# Altium PCB AWT25-000093_ZIM1.PcbDoc (part 1 of 4)
Units mm, origin at the board's own origin, x right, y up, seen from the top; angles counter-clockwise.
Board outline 210 x 108 mm, 6 copper layers (Top Layer, Mid-Layer 1, Internal Plane 2, Power, Mid-Layer 2, Bottom Layer); 303 components, 298 nets, 1319 pads, 1113 vias.
Unrouted connection lines stored in the file: 85.
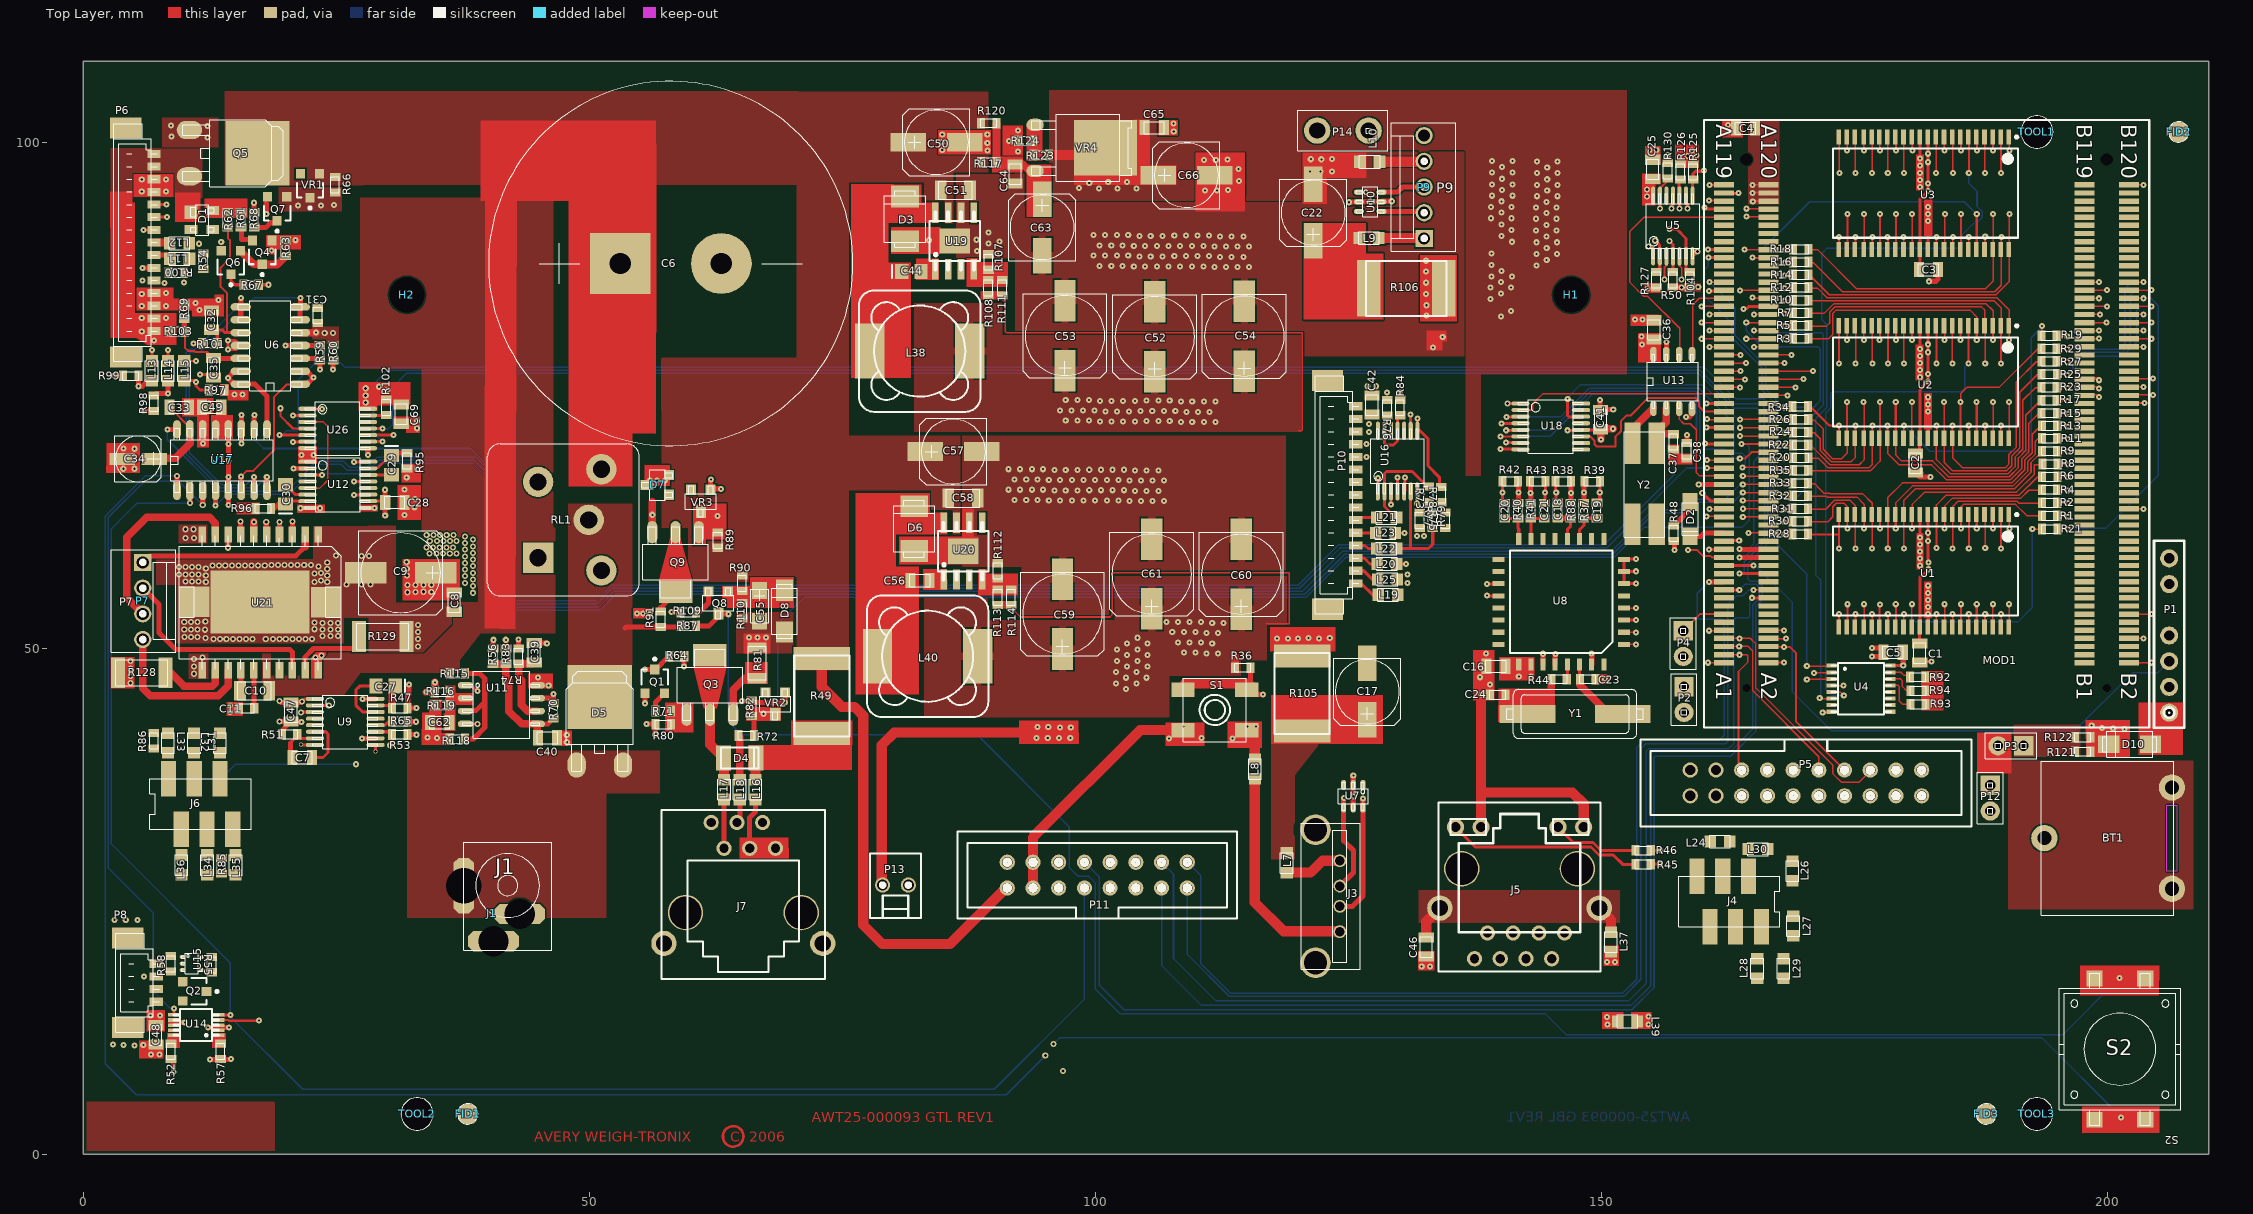
[diagram p0: Top Layer view]
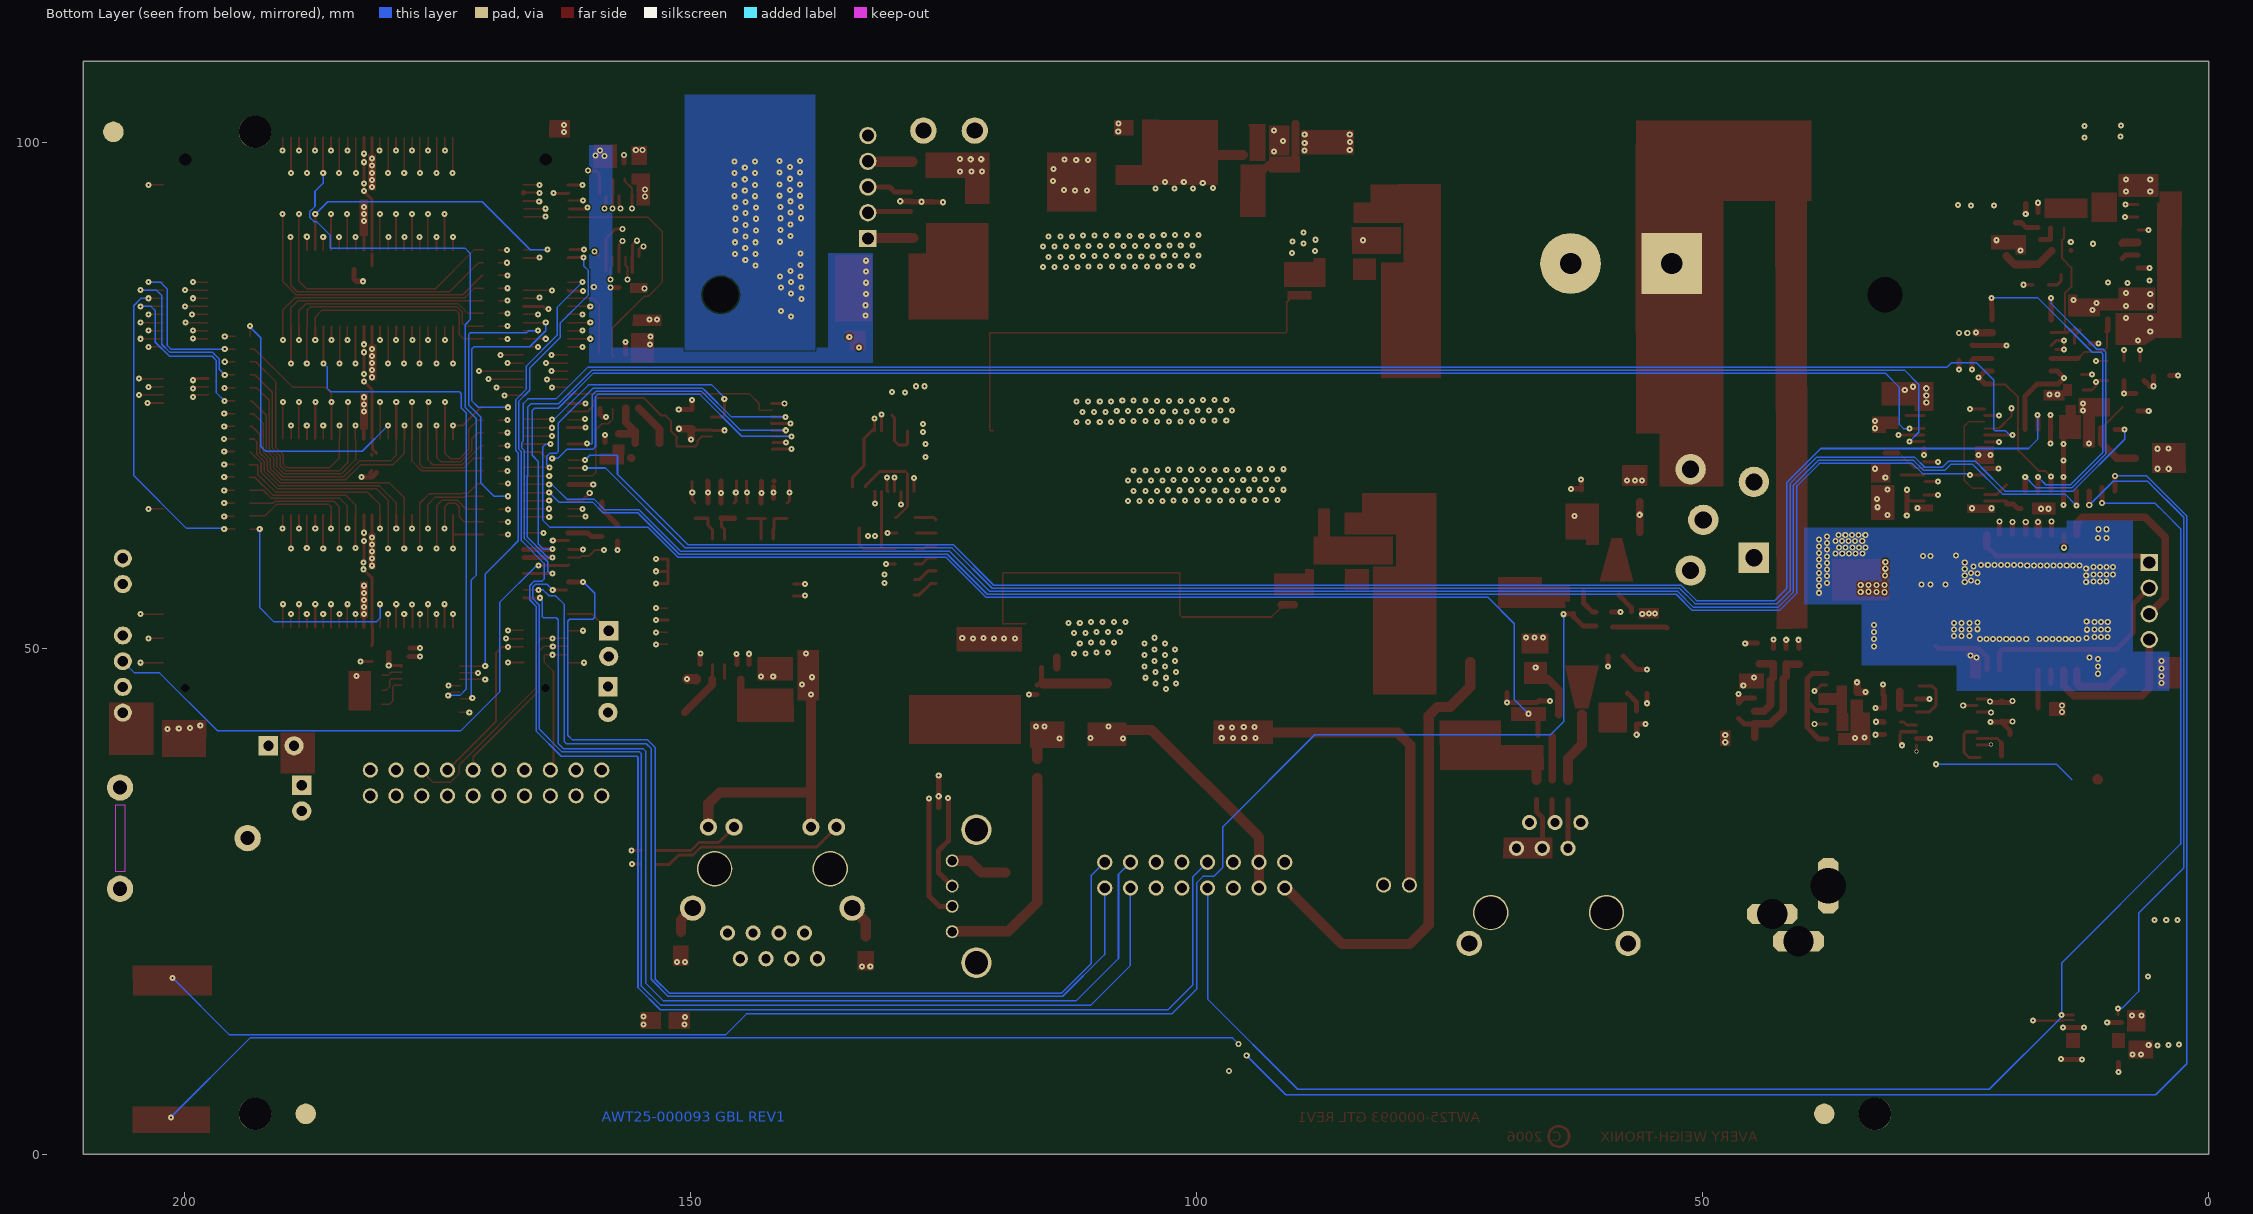
[diagram p1: Bottom Layer view, seen from below]
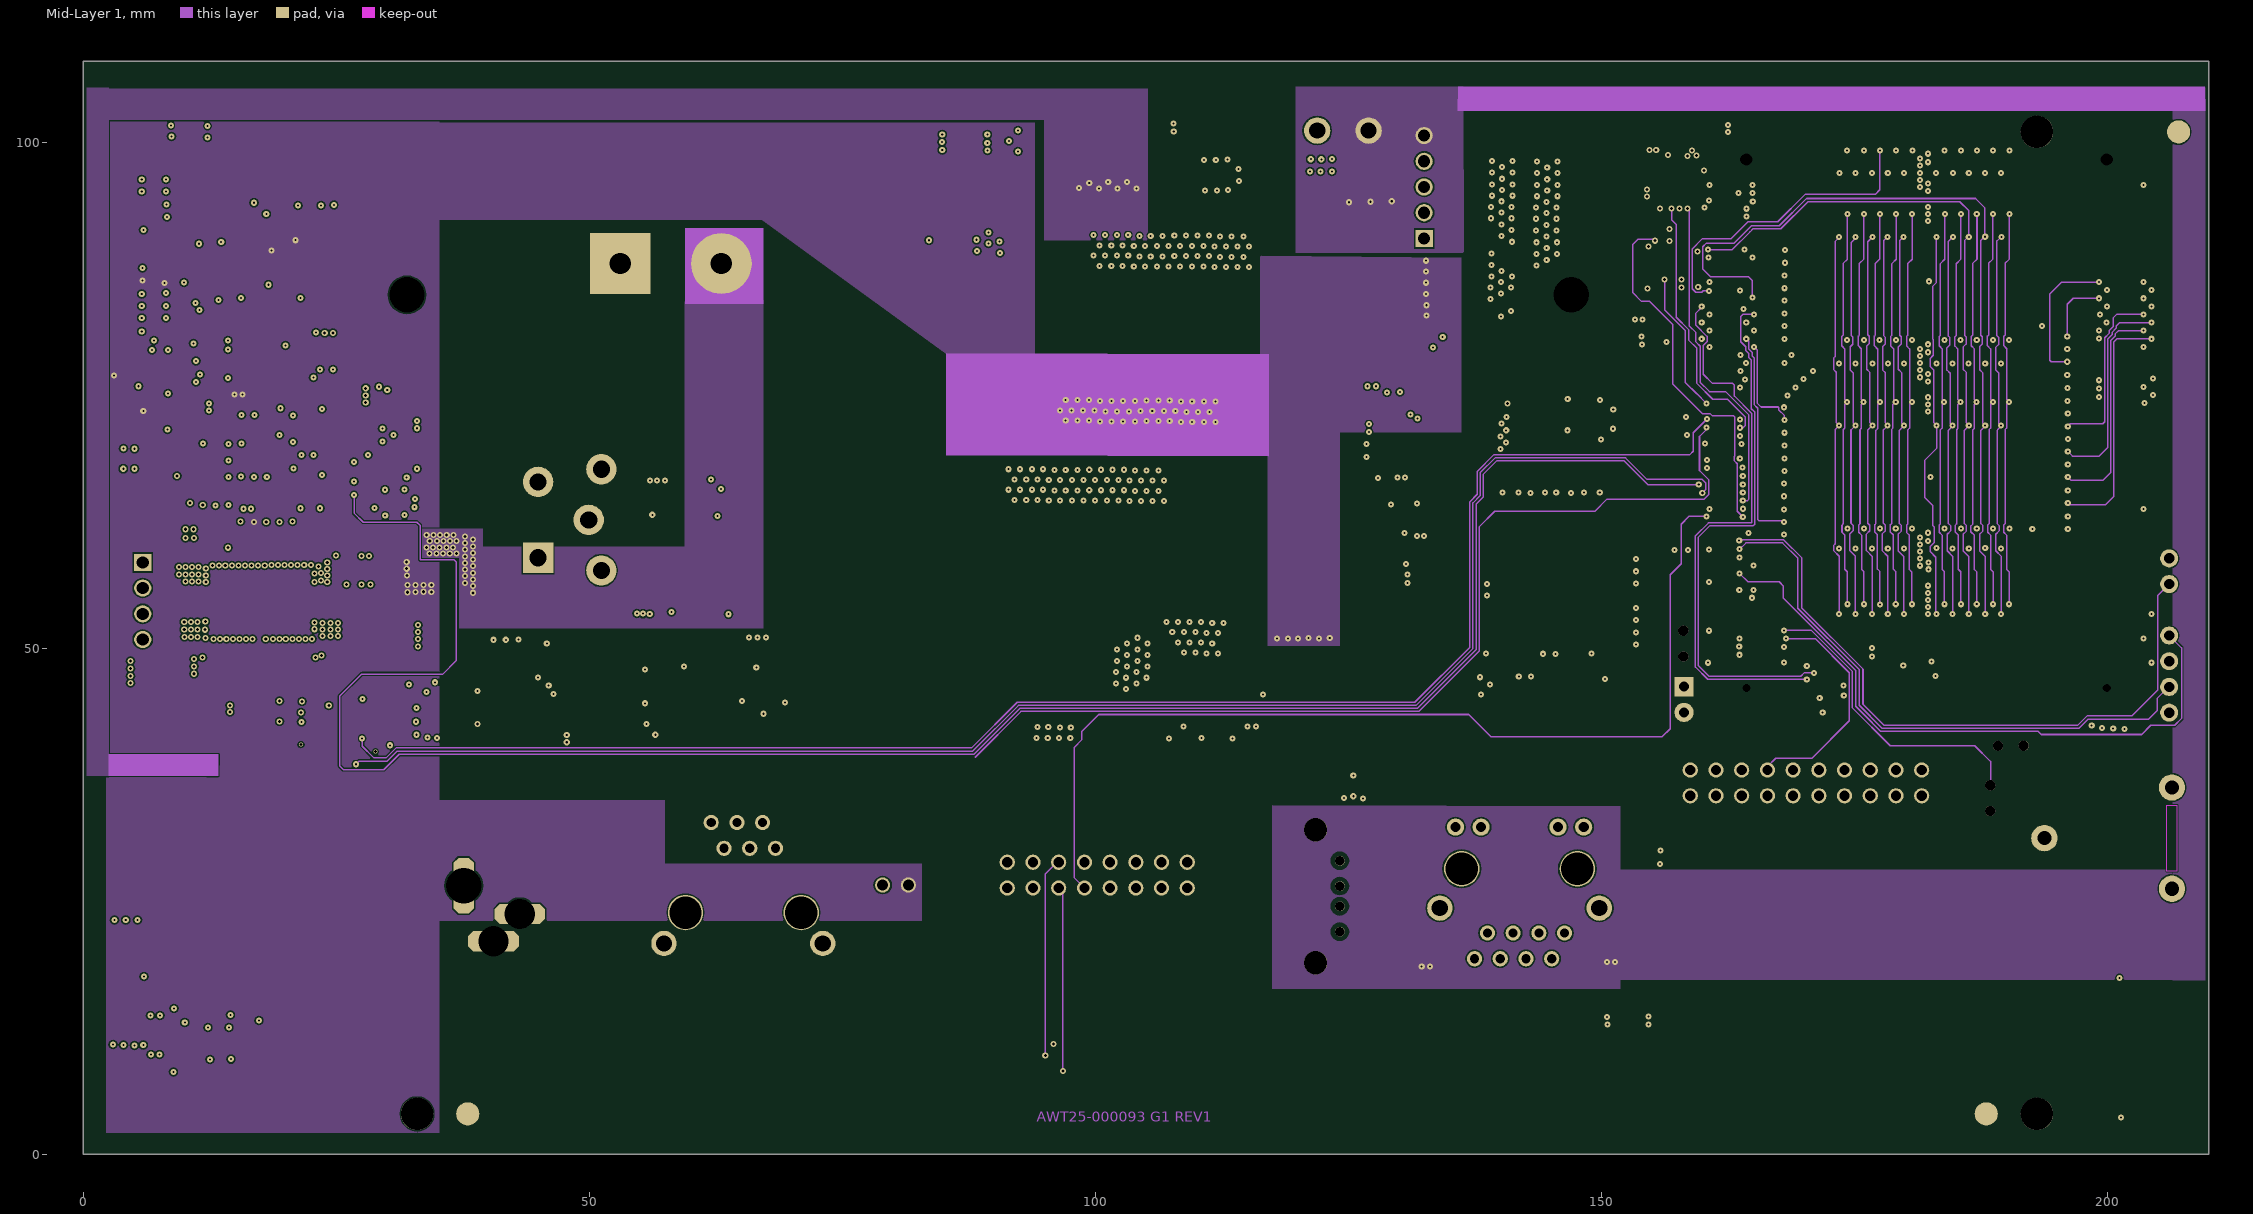
[diagram p2: Mid-Layer 1]
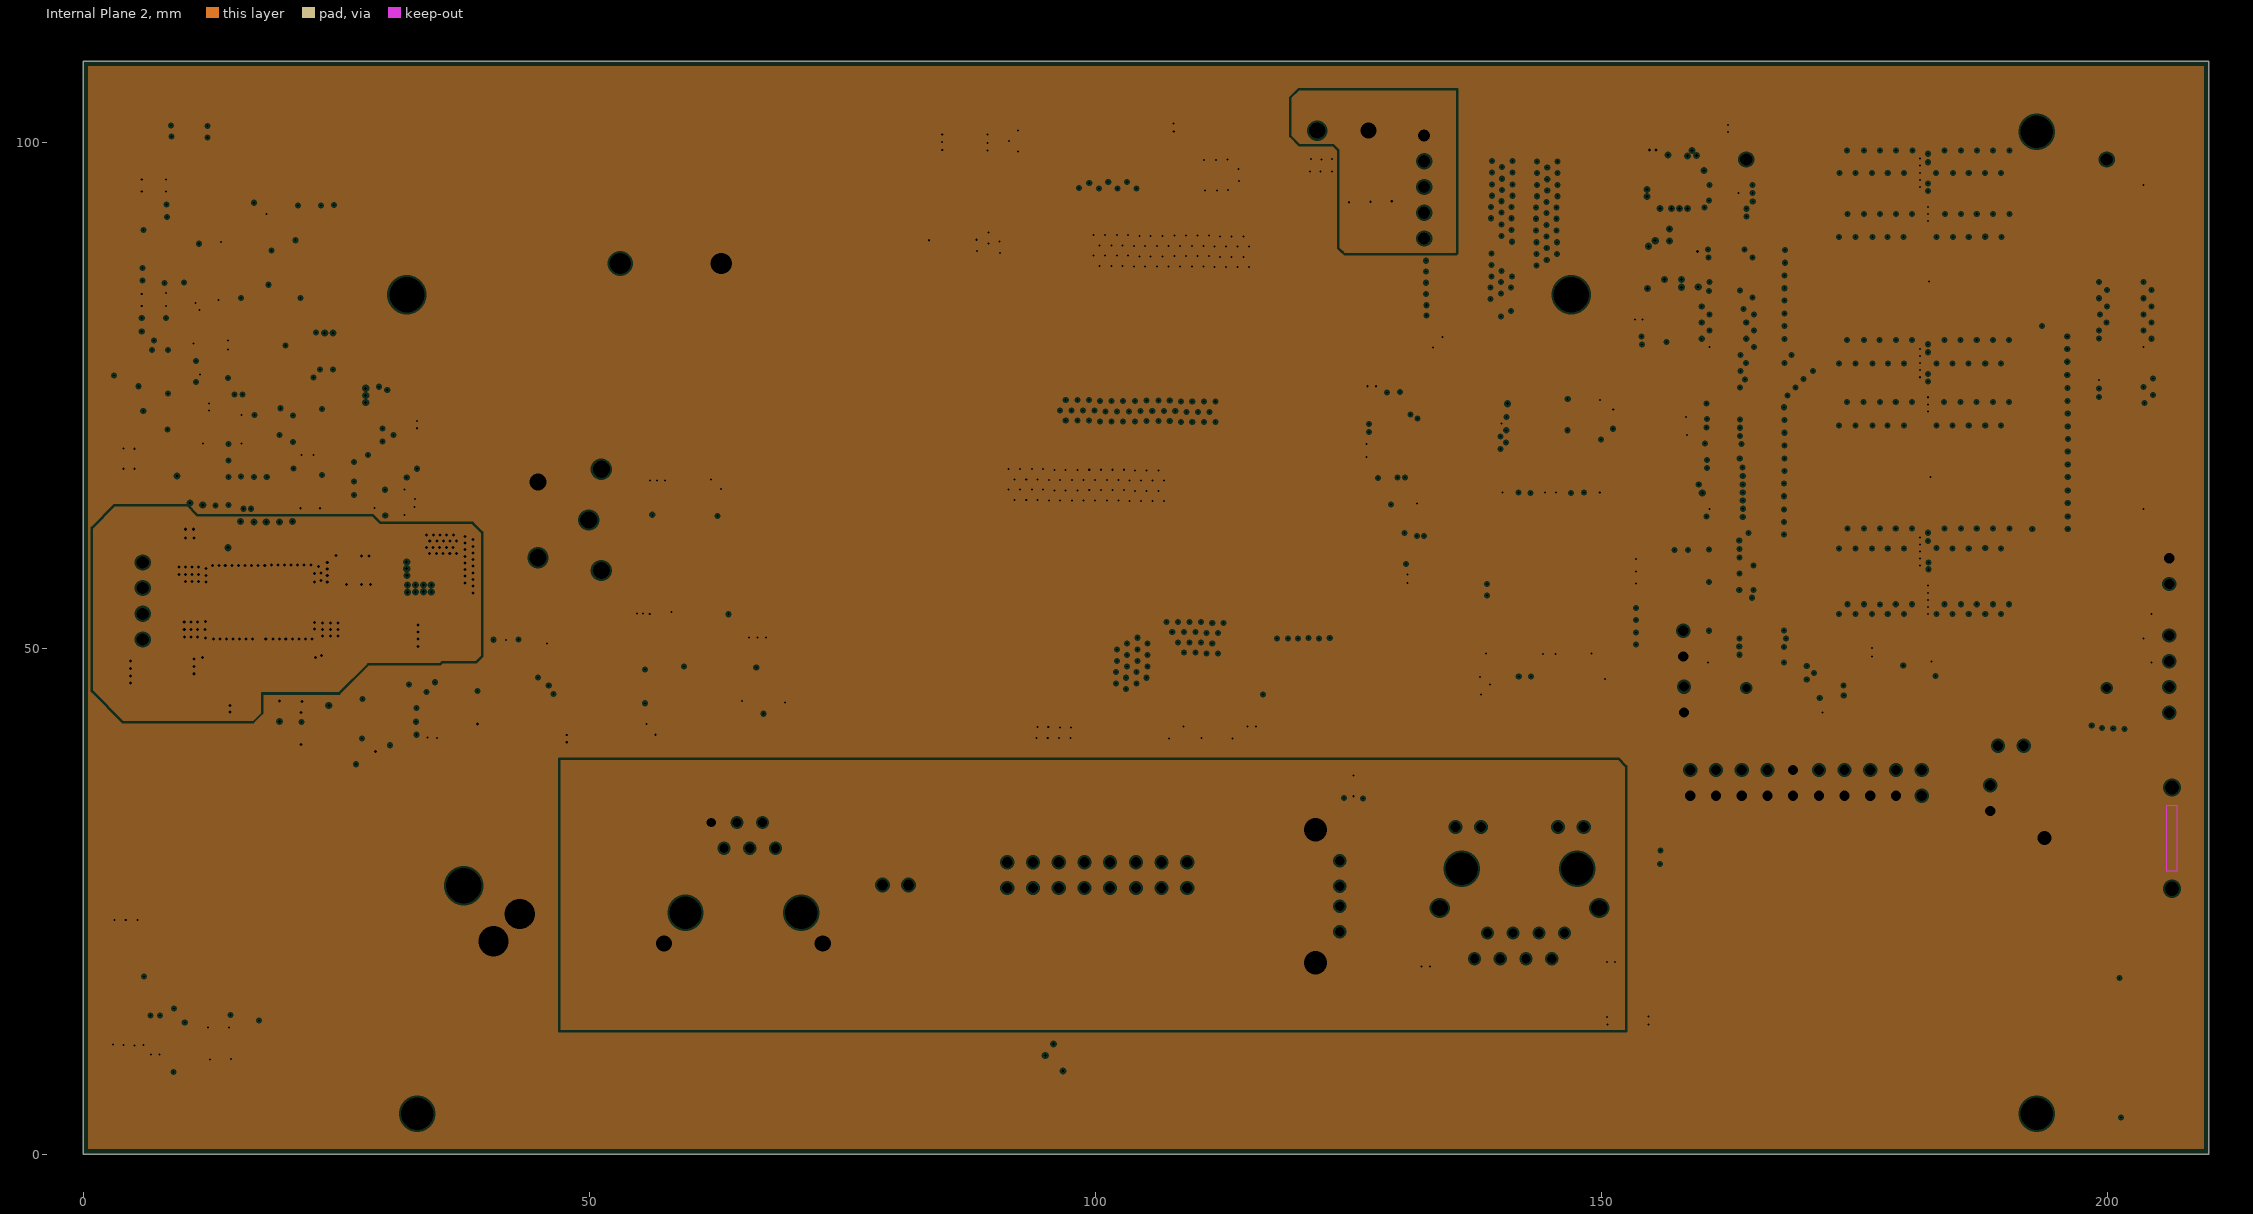
[diagram p3: Internal Plane 2, clearances drawn from the general rule]
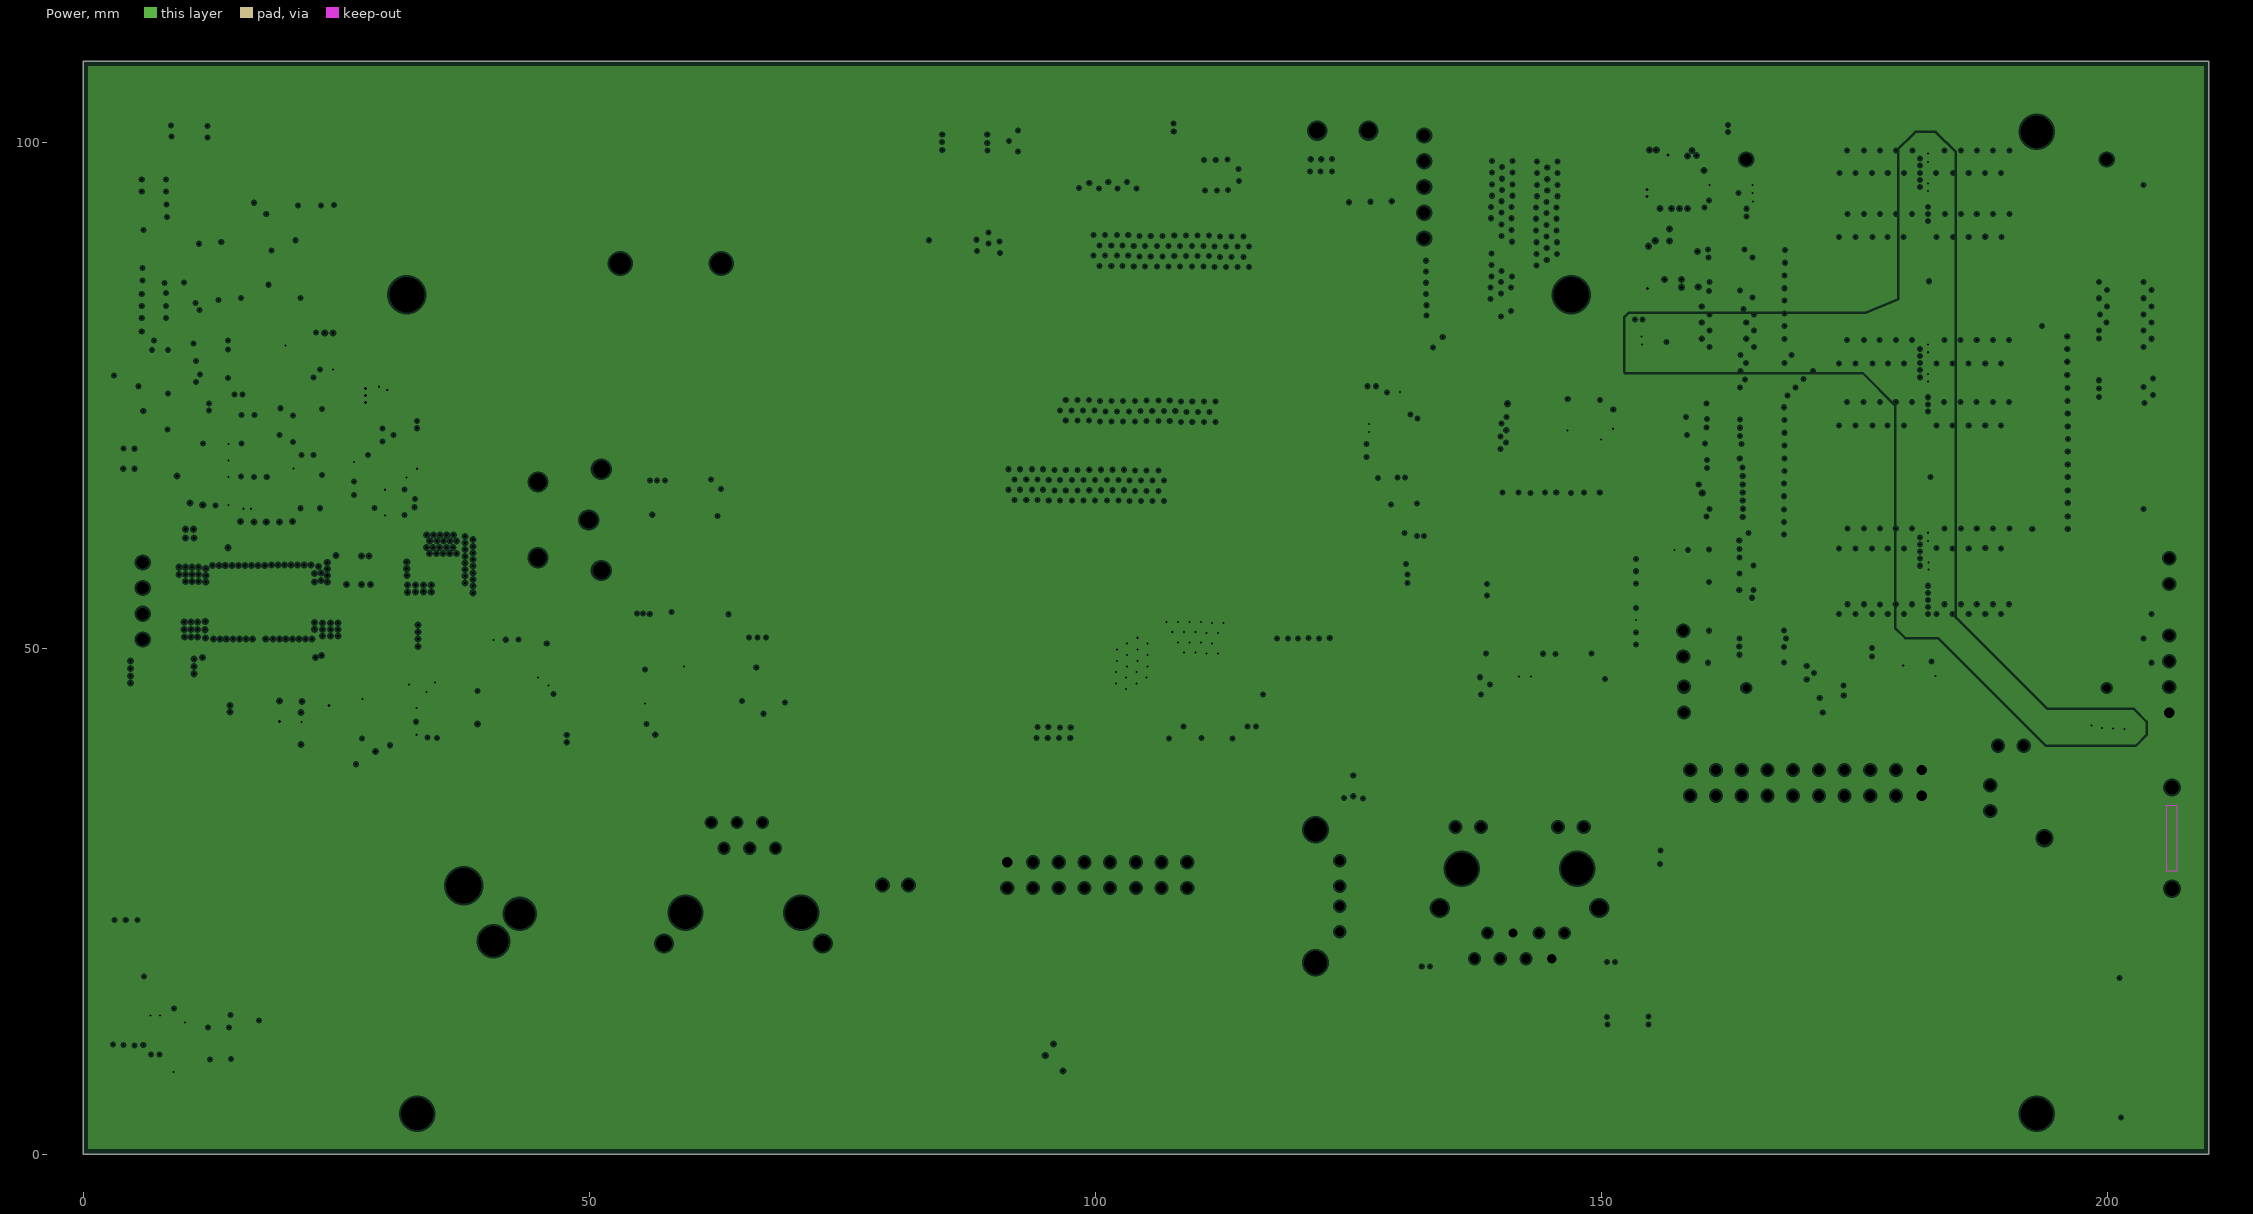
[diagram p4: Power, clearances drawn from the general rule]
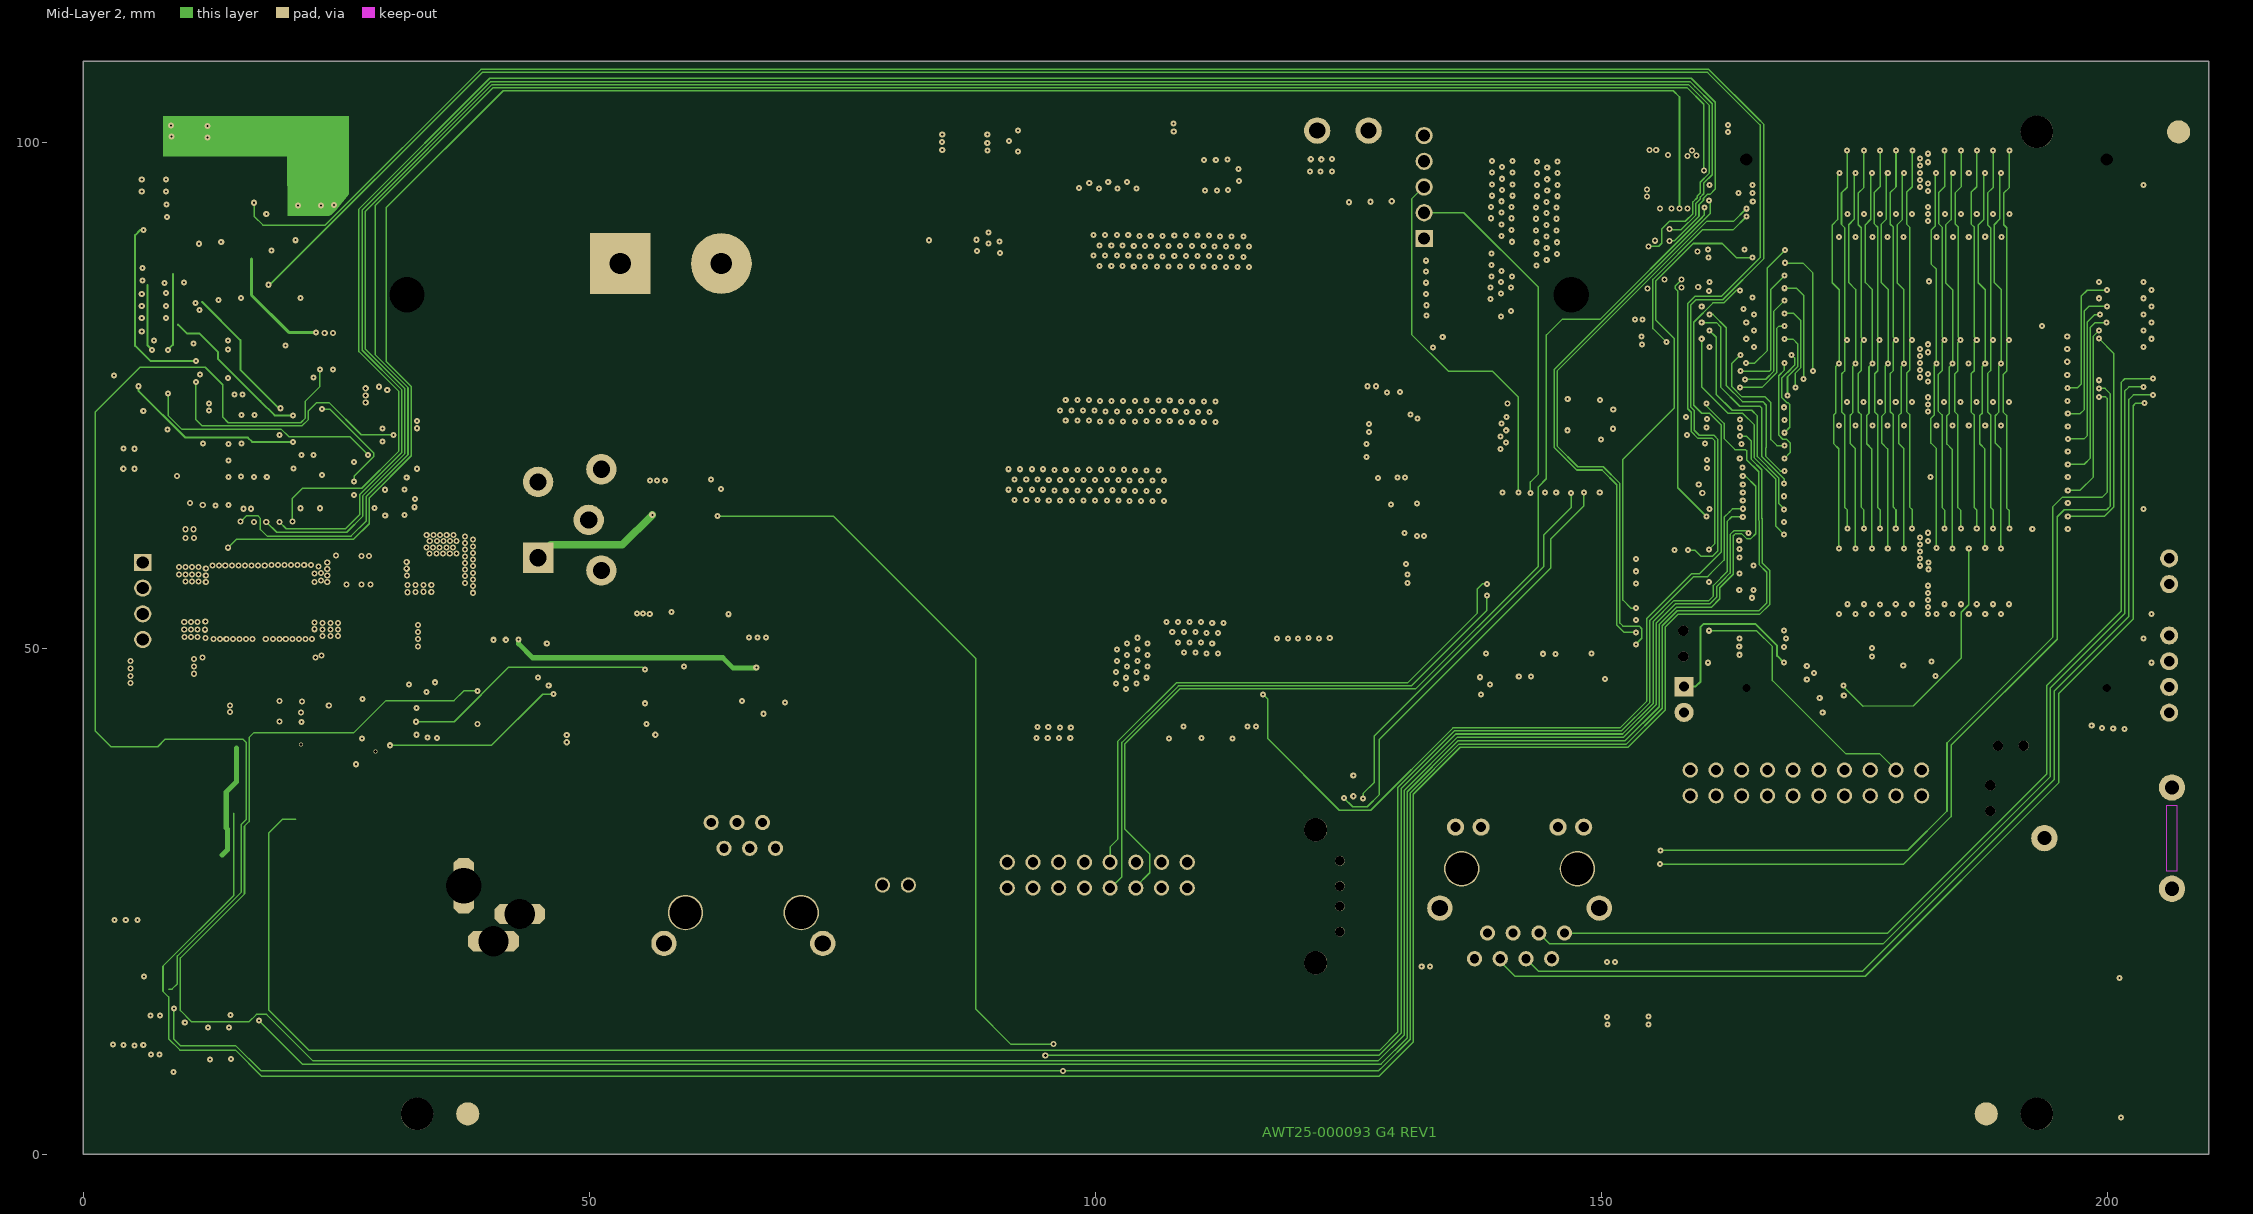
[diagram p5: Mid-Layer 2]

## Layer stack, top to bottom
Top Layer: signal copper 0.0356
Dielectric: prepreg 0.32, FR-4, Dk 4.8
Mid-Layer 1: signal copper 0.0356
Dielectric: prepreg 0.32, FR-4, Dk 4.8
Internal Plane 2: plane copper 0.036, net (Multiple Nets)
Dielectric: prepreg 0.32, FR-4, Dk 4.8
Power: plane copper 0.036, net (Multiple Nets)
Dielectric: prepreg 0.32, FR-4, Dk 4.8
Mid-Layer 2: signal copper 0.0356
Dielectric: core 0.32, FR-4, Dk 4.8
Bottom Layer: signal copper 0.0356

## Board outline
0,0 0,108 210,108 210,0

## Design rules (kind name [scope] priority, off if disabled: settings)
Clearance Nic [(InComponent('FID1') AND InComponent('FID2') AND InComponent('FID3') AND InComponent('H1') AND InComponent('H2'))] p1: gap=0
Clearance NetTieAtC6_Clearence [InNet('0VM') And OnLayer('Mid-Layer 1') vs InNet('0VD') And OnLayer('Mid-Layer 1')] p2: gap=-5
Clearance AllLayers [All] p3: gap=0.15
ComponentClearance [All] p1: gap=0.2 collisioncheckmode=2 verticalgap=0
FanoutControl Fanout_BGA [IsBGA] p1: bgadir=Out bgaviamode=Centered fanoutstyle=BGA fanoutdirection=None viagrid=0.025 // Fanout_BGA (Default Rule)
FanoutControl Fanout_Small [(CompPinCount < 5)] p4: bgadir=Out bgaviamode=Centered fanoutstyle=Auto fanoutdirection=OutOnly viagrid=0.025 // Fanout_Small (Default Rule)
FanoutControl Fanout_Default [All] p5: bgadir=Out bgaviamode=Centered fanoutstyle=Auto fanoutdirection=OutOnly viagrid=0.025 // Fanout_Default (Default Rule)
Height [All] p1: minheight=0 maxheight=50 prefheight=12.7
HoleSize [All] p1: absolutevalues=TRUE maxlimit=5.54 minlimit=0.025 maxpercent=80.000 minpercent=20.000
LayerPairs [All] p1: enforce=FALSE
PlaneClearance [All] p1: clearance=0.2
PlaneConnect [All] p1: planeconnectstyle=Direct reliefexpansion=0.508 reliefentries=4 reliefconductorwidth=0.254 reliefairgap=0.254
PolygonConnect ThermalReliefPadsRule [(InPadClass('ThermalReliefPads'))] p1: connectstyle=Relief reliefconductorwidth=0.75 reliefentries=4 polygonreliefangle="90 Angle"
PolygonConnect [All] p2: connectstyle=Direct reliefconductorwidth=0.254 reliefentries=4 polygonreliefangle="90 Angle"
RoutingVias [All] p1: holewidth=0.3 width=0.6 viastyle="Through Hole" minholewidth=0.2 minwidth=0.4 maxholewidth=0.4 maxwidth=0.9
ShortCircuit NetTieAtC6_ShortCircuit [InNet('0VM') And OnLayer('Mid-Layer 1') vs InNet('0VD') And OnLayer('Mid-Layer 1')] p1: allowed=TRUE
ShortCircuit [All] p2: allowed=FALSE
SolderMaskExpansion [All] p1: expansion=0.1
SupplyNets [InNetClass('PowerNets')] p1: voltage=0.000
TestPointUsage [All] p1: valid=0 allowmultiple=FALSE
Testpoint [All] p1: side=15 testpointundercomponent=TRUE minsize=1.016 maxsize=2.54 preferedsize=1.524 minholesize=0 maxholesize=1.016 preferedholesize=0.813 testpointgrid=0.025 style=1023 order=0123456789
Width PowerNets [InNetClass('PowerNets')] p1: maxlimit=1 minlimit=0.254 preferedwidth=0.5
Width [All] p2: maxlimit=5 minlimit=0.15 preferedwidth=0.15
9 further rules are at their usual default settings.

## Classes and differential pairs
pad class ThermalReliefPads: C52-1 C52-2 C53-1 C53-2 C54-1 C54-2 C59-1 C59-2 C60-1 C60-2 C61-1 C61-2 C63-1 C63-2 L38-1 L38-2 L40-1 L40-2
net class DM[0..15]: DM0 DM1 DM2 DM3 DM4 DM5 DM6 DM7 DM8 DM9 DM10 DM11 DM12 DM13 DM14 DM15
net class DA[0..21]: DA0 DA1 DA2 DA3 DA4 DA5 DA6 DA7 DA8 DA9 DA10 DA11 DA12 DA13 DA14 DA15 DA16 DA17 DA18 DA19 DA20 DA21
net class A[0..18]: A0 A1 A2 A3 A4 A5 A6 A7 A8 A9 A10 A11 A12 A13 A14 A15 A16 A17 A18
net class D[0..15]: D0 D1 D2 D3 D4 D5 D6 D7 D8 D9 D10 D11 D12 D13 D14 D15
net class SCON[1..4]: SCON1 SCON2 SCON3 SCON4
component class "DIGITAL PROCESSING": C1 C2 C3 C4 C5 C36 C37 C38 D2 P5 P12 R1 R2 R3 R4 R5 R6 R7 R8 R9 R10 R11 R12 R13 R14 R15 R16 R17 R18 R19 R20 R21 R22 R23 R24 R25 R26 R27 R28 R29 R30 R31 R32 R33 R34 R35 R36 R48 R92 R93 R94 S1 U1 U2 U3 U4 U13
component class "EXTERNAL I/O": C7 C39 C40 C41 C42 D4 L16 L17 L18 L19 L20 L21 L22 L23 L24 L25 L26 L27 L28 L29 L30 L31 L32 L33 L34 L35 L36 Q1 Q3 R49 R51 R53 R56 R64 R65 R70 R71 R72 R73 R74 R75 R76 R77 R78 R79 R80 R81 R82 R83 R84 R85 R86 U16 U18 VR2
component class "POWER SUPPLY": BT1 C6 C44 C50 C51 C52 C53 C54 C55 C56 C57 C58 C59 C60 C61 C62 C63 C64 C65 C66 D5 D7 D8 D10 J1 L38 L39 L40 MOD1 P2 P3 P4 Q8 Q9 R87 R89 R90 R91 R107 R108 R109 R110 R111 R112 R113 R114 R115 R116 R117 R118 R119 R120 R121 R122 R123 R124 RL1 S2 U11 U19 U20 VR3 VR4
component class "PRINTER INTERFACE": C25 C28 C29 C30 C31 C32 C33 C34 C35 C48 C49 C69 D1 L11 L12 L13 L14 L15 P1 Q2 Q4 Q5 Q6 Q7 R50 R52 R54 R55 R57 R58 R59 R60 R61 R62 R63 R66 R67 R68 R69 R95 R96 R97 R98 R99 R100 R101 R102 R103 U6 U12 U14 U15 U17 U21 U26 VR1
component class "SERIAL INTERFACE": C16 C17 C18 C19 C20 C21 C22 C23 C24 C46 L7 L8 L9 L10 L37 R37 R38 R39 R40 R41 R42 R43 R44 R45 R46 R88 R105 R106 U7 U8 U10 Y1
component class TOP: ASSY ASSY1 FID1 FID2 FID3 H1 H2 J3 J4 J5 J6 J7 MACH P6 P7 P8 P9 P10 P11 P13 P14 TOOL1 TOOL2 TOOL3

## Components (designator, comment, footprint, x,y, rotation, side; value= is the part's Value field where it differs from the comment)
BT1 "70646-132" Y_2B80P4 206.342,36.236 r180 top
C1 "CXD100N0K025AR" C0805#1 181.429,49.521 r0 top
C2 "CXD100N0K025AR" C0805#1 181,68.3 r0 top
C3 "CXD100N0K025AR" C0805#1 182.3,87.4 r90 top
C4 "CXD100N0K025AR" C0805#1 164.225,101.375 r270 top
C5 "CXD100N0K025AR" C0805#1 178.8,49.6 r270 top
C6 "AWT25-000122" C35X35 53.056,88 r0 top
C7 "CXD100N0K025AR" C0805#1 21.651,39.2 r90 top
C8 "CXD100N0K025AR" C0805#1 36.675,54.55 r0 top
C9 "CXB22U00M050NA" C8X10 31.375,57.45 r270 top
C10 "CXD100N0K063M" C1206 16.95,45.8 r270 top
C11 "CXD1N000K050AR" C0603 16.15,44.075 r270 top
C16 "CXD100N0K025AR" C0805#1 139.575,48.225 r270 top
C17 "60148-0460" C6.3X8#1 126.862,45.708 r180 top
C18 "CXD22P00K050BC" C0603 145.672,63.597 r180 top
C19 "CXD22P00K050BC" C0603 149.547,63.597 r180 top
C20 "CXD22P00K050BC" C0603 140.447,63.572 r180 top
C21 "CXD22P00K050BC" C0603 144.347,63.572 r180 top
C22 "60148-0460" C6.3X8#2 121.526,93.025 r180 top
C23 "CXD33P00K050BC" C0603 148.625,46.95 r90 top
C24 "CXD33P00K050BC" C0603 139.75,45.4 r270 top
C25 "CXD100N0K025AR" C0805#1 155.05,97.3 r180 top
C27 "CXD10N00K100AR" C0805#2 29.887,46.258 r180 top
C28 "CXD100N0K025AR" C0805#1 30.8,64.4 r90 top
C29 "CXD10N00K100AR" C0805#2 30.475,68.075 r270 top
C30 "CXD10N00K100AR" C0805#2 20,65.2 r90 top
C31 "AWT25-500066" C0603 23.175,82.875 r180 top
C32 "CXD100N0K025AR" C0805#1 12.7,82.4 r180 top
C33 "CXD100N0K025AR" C0805#1 9.5,73.8 r90 top
C34 "AWT25-000131" C4.5X6.1 5.443,68.702 r270 top
C35 "CXD100N0K025AR" C0805#1 12.9,77.7 r0 top
C36 "CXD100N0K025AR" C0805#1 155.175,81.45 r180 top
C37 "CXD15P00K050BC" C0603 157.105,70.377 r0 top
C38 "CXD15P00K050BC" C0603 158.404,69.502 r180 top
C39 "CXD100N0K025AR" C0805#1 44.575,49.55 r180 top
C40 "CXD100N0K025AR" C0805#1 45.875,41.15 r90 top
C41 "CXD100N0K025AR" C0805#1 149.906,72.576 r180 top
C42 "CXD100N0K025AR" C0805#1 127.325,74.025 r180 top
C44 "CXD100N0K025AR" C0805#2 81.824,87.223 r0 top
C46 "CXD100N0K025AR" C0805#1 132.686,20.49 r0 top
C47 "CXD100N0K025AR" C0805#1 20.55,43.7 r180 top
C48 "CXD100N0K025AR" C0805#1 7.2,11.8 r0 top
C49 "CXD100N0K025AR" C0805#1 12.7,73.8 r270 top
C50 "60148-0460" C6.3X8#1 84.298,99.969 r90 top
C51 "AWT25-000133" C1206 86.173,95.245 r90 top
C52 "60148-0494" C8X10 105.868,80.774 r180 top
C53 "60148-0494" C8X10 96.995,80.874 r180 top
C54 "60148-0494" C8X10 114.716,80.824 r180 top
C55 "53633-3040" C3216 66.828,54.181 r0 top
C56 "CXD100N0K025AR" C0805#1 82.674,56.68 r90 top
C57 "60148-0460" C6.3X8#1 85.973,69.427 r90 top
C58 "AWT25-000133" C1206 86.923,64.828 r90 top
C59 "60148-0494" C8X10 96.75,53.375 r180 top
C60 "60148-0494" C8X10 114.416,57.305 r180 top
C61 "60148-0494" C8X10 105.568,57.33 r180 top
C62 "CXD100N0K025AR" C0805#1 35.236,42.659 r270 top
C63 "60148-0460" C6.3X8#2 94.746,91.571 r0 top
C64 "CXD100N0K025AR" C0805#1 92.071,96.845 r0 top
C65 "CXD100N0K025AR" C0805#1 105.818,101.419 r90 top
C66 "CXB100U0M016NA" C6.3X5.8 108.992,96.72 r90 top
C69 "CXD100N0K025AR" C0805#1 31.425,73.125 r0 top
D1 "DXS030/0A200/JS" SOT143B 11.742,92.296 r270 top
D2 "70642-252" LED_KP3216 158.75,62.75 r90 top
D3 "60204-0032" SMB_W-B 81.2,92.4 r0 top
D4 "DXS200/01A5/HR" SOD87 64.875,39.15 r180 top
D5 "DXS100/012A/HV" DPAK 51.05,42.775 r0 top
D6 "60204-0032" SMB_W-B 82.1,61.8 r0 top
D7 "ZX12V00/0W35" SOT23#1 56.725,66.125 r90 top
D8 "DXS040/0140/HV" SMA 69.277,53.656 r0 top
D10 "DXS040/0140/HV" SMA 202.168,40.51 r90 top
FID1 "*" FIDUCIAL 38,4 r90 top
FID2 "*" FIDUCIAL 207,101 r90 top
FID3 "*" FIDUCIAL 188,4 r90 top
H1 "none" NPTH_3_5MM 147,84.9 r90 top
H2 "none" NPTH_3_5MM 32,84.9 r90 top
J1 "AWT25-000128" CU_PJ-006A 37.6,26.55 r0 top
J3 "AWT25-500058" USB-A-4-V 124.15,29 r270 top
J4 "70615-244" A_7-188275-6 165.786,22.476 r180 top
J5 "TMP_UK_XRJV-11-01-8-8-4-901" XRLV1101884901 141.9,19.325 r0 top
J6 "70615-244" A_7-188275-6 8.437,37.103 r0 top
J7 "70615-291" AJ-012SH-7-D-3 62.05,32.775 r180 top
L7 "70668-731" L0805S 118.9,28.8 r0 top
L8 "70668-731" L0805S 115.765,38.06 r0 top
L9 "70668-731" L0805S 127.026,90.525 r90 top
L10 "70668-731" L0805S 127.101,98.05 r90 top
L11 "70668-731" L0805S 9.55,88.475 r270 top
L12 "70668-731" L0805S 9.525,90 r270 top
L13 "70668-731" L0805S 6.8,77.4 r180 top
L14 "70668-731" L0805S 8.4,77.4 r180 top
L15 "70668-731" L0805S 10,77.4 r180 top
L16 "70668-731" L0805S 66.425,36.025 r0 top
L17 "70668-731" L0805S 63.325,36.025 r0 top
L18 "70668-731" L0805S 64.875,36.025 r0 top
L19 "70668-731" L0805S 128.9,55.275 r270 top
L20 "70668-731" L0805S 128.8,58.325 r270 top
L21 "70668-731" L0805S 128.775,62.9 r270 top
L22 "70668-731" L0805S 128.775,59.85 r270 top
L23 "70668-731" L0805S 128.65,61.375 r270 top
L24 "70668-731" L0805S 161.687,30.899 r270 top
L25 "70668-731" L0805S 128.85,56.8 r270 top
L26 "70668-731" L0805S 168.86,28 r0 top
L27 "70668-731" L0805S 168.935,22.551 r180 top
L28 "70668-731" L0805S 165.373,18.373 r180 top
L29 "70668-731" L0805S 167.973,18.373 r180 top
L30 "70668-731" L0805S 165.461,30.149 r270 top
L31 "70668-731" L0805S 13.525,40.625 r0 top
L32 "70668-731" L0805S 10.975,40.625 r0 top
L33 "70668-731" L0805S 8.4,40.625 r0 top
L34 "70668-731" L0805S 12.275,28.6 r180 top
L35 "70668-731" L0805S 15.075,28.6 r180 top
L36 "70668-731" L0805S 9.725,28.6 r180 top
L37 "70668-731" L0805S 150.931,20.99 r180 top
L38 "744770133" WE-PD-XL 82.649,79.35 r180 top
L39 "70668-731" L0805S 152.556,13.142 r270 top
L40 "744770133" WE-PD-XL 83.424,49.207 r180 top
MOD1 "" NS9360_MODULE_NIC 202.1,48.565 r180 top
P1 "BOOT_HEADER" NS9360_BOOT 206.067,43.634 r180 top
P2 "17734-0015" P2#1 158.15,46.2 r270 top
P3 "17734-0015" P2#2 191.696,40.36 r180 top
P4 "17734-0015" P2#2 158.075,51.725 r270 top
P5 "TMP_UK_NS9360" PH2M54DR-20 181.623,37.96 r180 top
P6 "70615-648" M_53398-1590-PIN_REV 7.025,98.825 r270 top
P7 "70612-144" M_22-27-2041 5.9,58.475 r270 top
P8 "70615-646" M_53398-0490-PIN_REV 7.225,18.825 r270 top
P9 "70612-707" M_22-27-2051 132.476,90.475 r90 top
P10 "70615-648" M_53398-1590-PIN_REV 125.725,73.9 r270 top
P11 "70612-383" PH2M54DR-16 91.297,26.313 r0 top
P12 "17734-0015" P2#2 188.397,36.461 r270 top
P13 "70612-142" 22-27-2021 81.525,26.6 r180 top
P14 "18136-524" PTAB1_4_8V 124.45,101.125 r180 top
Q1 "TXPY/BC857/A" SOT23#2 56.475,46.725 r0 top
Q2 "TXNB/BC847" SOT23#2 11.025,16.1 r270 top
Q3 "TXNB/FZT651" SOT-223 61.925,46.375 r0 top
Q4 "TXNB/BC847" SOT23#2 17.7,89.1 r180 top
Q5 "FXP/RFD15P05SM" DPAK 14.825,98.9 r270 top
Q6 "TXNB/BC847" SOT23#2 14.6,88.1 r180 top
Q7 "TXNB/BC847" SOT23#2 19.175,93.4 r180 top
Q8 "TXPY/BC857/A" SOT23#1 62.754,54.456 r180 top
Q9 "TXNB/BC847" SOT-223 58.53,58.505 r180 top
R1 "AWT25-000135" R0603 194.254,63.071 r270 top
R2 "AWT25-000135" R0603 194.254,64.365 r270 top
R3 "AWT25-000137" R0603 169.663,80.599 r270 top
R4 "AWT25-000135" R0603 194.254,65.665 r270 top
R5 "AWT25-000137" R0603 169.663,81.874 r270 top
R6 "AWT25-000135" R0603 194.279,66.946 r270 top
R7 "AWT25-000137" R0603 169.663,83.124 r270 top
R8 "AWT25-000135" R0603 194.3,68.2 r270 top
R9 "AWT25-000135" R0603 194.254,69.471 r270 top
R10 "AWT25-000137" R0603 169.663,84.374 r270 top
R11 "AWT25-000135" R0603 194.254,70.721 r270 top
R12 "AWT25-000137" R0603 169.663,85.624 r270 top
R13 "AWT25-000135" R0603 194.254,71.971 r270 top
R14 "AWT25-000137" R0603 169.679,86.896 r270 top
R15 "AWT25-000135" R0603 194.229,73.221 r270 top
R16 "AWT25-000137" R0603 169.679,88.146 r270 top
R17 "AWT25-000135" R0603 194.204,74.496 r270 top
R18 "AWT25-000137" R0603 169.679,89.396 r270 top
R19 "AWT25-000135" R0603 194.204,80.871 r270 top
R20 "AWT25-000137" R0603 169.679,68.821 r270 top
R21 "AWT25-000135" R0603 194.263,61.775 r270 top
R22 "AWT25-000137" R0603 169.654,70.071 r270 top
R23 "AWT25-000135" R0603 194.204,75.771 r270 top
R24 "AWT25-000137" R0603 169.654,71.346 r270 top
R25 "AWT25-000135" R0603 194.217,77.072 r270 top
R26 "AWT25-000137" R0603 169.654,72.596 r270 top
R27 "AWT25-000135" R0603 194.204,78.346 r270 top
R28 "AWT25-000137" R0603 169.638,61.285 r270 top
R29 "AWT25-000135" R0603 194.204,79.596 r270 top
R30 "AWT25-000137" R0603 169.638,62.535 r270 top
R31 "AWT25-000137" R0603 169.638,63.785 r270 top
R32 "AWT25-000137" R0603 169.65,65.05 r270 top
R33 "AWT25-000137" R0603 169.638,66.31 r270 top
R34 "AWT25-000137" R0603 169.629,73.871 r270 top
R35 "AWT25-000137" R0603 169.654,67.571 r270 top
R36 "RXF3K3000/FZQ" R0603 114.566,48.083 r90 top
R37 "AWT25-000137" R0603 148.247,63.597 r180 top
R38 "RXF15K000/FZQ" R0603 146.222,66.497 r270 top
R39 "RXF15K000/FZQ" R0603 149.075,66.475 r90 top
R40 "AWT25-000137" R0603 141.747,63.572 r180 top
R41 "AWT25-000137" R0603 143.022,63.572 r180 top
R42 "RXF15K000/FZQ" R0603 140.985,66.497 r270 top
R43 "RXF15K000/FZQ" R0603 143.697,66.497 r90 top
R44 "RXF1K5000/FZQ" R0603 145.8,46.95 r90 top
R45 "AWT25-000136" R0603 154.1,28.652 r270 top
R46 "AWT25-000136" R0603 154.1,30.026 r270 top
R47 "AWT25-000167" R0603 31.301,44.075 r90 top
R48 "RXF220R00/FZQ" R0603 157.13,61.354 r0 top
R49 "AWT25-000130" FSMD050-2920 72.975,45.275 r270 top
R50 "RXF3K3000/FZQ" R0603 157.05,86.4 r180 top
R51 "RXF220K00/FZQ" R0603 20.4,41.5 r270 top
R52 "RXF1K0000/FZQ" R0603 8.693,10.168 r180 top
R53 "RXF10K000/FZQ" R0603 31.276,41.475 r270 top
R54 "RXF10K000/FZQ" R0603 11.875,88.225 r180 top
R55 "RXF10K000/FZQ" R0603 12.725,18.75 r180 top
R56 "RXF27K000/FZQ" R0603 40.5,49.225 r0 top
R57 "RXF2K2000/FZQ" R0603 13.575,10.175 r0 top
R58 "AWT25-000136" R0603 8.675,18.825 r180 top
R59 "RXF4K7000/FZQ" R0603 23.4,79.2 r0 top
R60 "RXF10K000/FZQ" R0603 24.7,79.2 r180 top
R61 "RXF1K5000/FZQ" R0603 15.6,92.3 r180 top
R62 "RXF10K000/FZQ" R0603 14.3,92.3 r180 top
R63 "RXF10K000/FZQ" R0603 20,89.5 r0 top
R64 "RXF10K000/FZQ" R0603 58.63,49.207 r270 top
R65 "RXF3K3000/FZQ" R0603 31.276,42.775 r90 top
R66 "RXF10K000/FZQ" R0603 24.9,95.775 r0 top
R67 "RXF47K000/FZQ" R0603 16.6,85.9 r270 top
R68 "RXF47K000/FZQ" R0603 16.9,92.3 r0 top
R69 "RXF10K000/FZQ" R0603 10,83.3 r180 top
R70 "RXF100K00/FZQ" R0603 46.45,43.825 r0 top
R71 "RXF220R00/FZQ" R0603 57.3,43.8 r90 top
R72 "RXF15K000/FZQ" R0603 65.5,41.375 r90 top
R73 "RXF0K0000/FZQ" R0603 132.05,62.65 r180 top
R74 "RXF47K000/FZQ" R0603 43.025,49.225 r180 top
R75 "RXF0K0000/FZQ" R0603 134.575,62.625 r180 top
R76 "RXF3K3000/FZQ" R0603 128.825,73.75 r180 top
R77 "RXF3K3000/FZQ" R0603 132.925,65.2 r180 top
R78 "RXF3K3000/FZQ" R0603 133.325,62.625 r0 top
R79 "RXF3K3000/FZQ" R0603 134.175,65.175 r180 top
R80 "RXF10K000/FZQ" R0603 57.3,42.475 r270 top
R81 "RXF1R0000/JBR" R1206 66.575,48.55 r180 top
R82 "RXF4K7000/FZQ" R0603 66.05,44.075 r180 top
R83 "RXF15K000/FZQ" R0603 41.775,49.225 r180 top
R84 "RXF3K3000/FZQ" R0603 130.1,73.775 r0 top
R85 "RXF4K7000/FZQ" R0603 13.675,28.5 r0 top
R86 "RXF4K7000/FZQ" R0603 7,40.85 r180 top
R87 "AWT25-000167" R0603 59.805,52.207 r90 top
R88 "AWT25-000137" R0603 146.975,63.6 r180 top
R89 "RXF10K000/FZQ" R0603 62.704,60.679 r180 top
R90 "RXF47K000/FZQ" R0603 65.103,56.405 r0 top
R91 "AWT25-000168" R0603 57.055,52.856 r180 top
R92 "RXF3K3000/FZQ" R0603 181.248,47.158 r270 top
R93 "RXF3K3000/FZQ" R0603 181.273,44.458 r270 top
R94 "RXF3K3000/FZQ" R0603 181.273,45.808 r270 top
R95 "AWT25-000136" R0603 32,68.5 r0 top
R96 "RXF100R00/FZQ" R0603 17.8,63.8 r270 top
R97 "RXF3K3000/FZQ" R0603 13.2,75.5 r270 top
R98 "RXF3K3000/FZQ" R0603 7,74.2 r180 top
R99 "RXF3K3000/FZQ" R0603 4.7,76.9 r90 top
R100 "RXF3K3000/FZQ" R0603 9.2,87.075 r90 top
R101 "RXF10K000/FZQ" R0603 12.5,80.1 r270 top
R102 "RXF3K3000/FZQ" R0603 29.95,73.8 r0 top
R103 "RXF100K00/FZQ" R0603 9.3,81.3 r90 top
R104 "RXF3K3000/FZQ" R0603 158.725,86.4 r180 top
R105 "AWT25-000130" FSMD050-2920 120.425,45.525 r270 top
R106 "AWT25-000130" FSMD050-2920 130.701,85.55 r180 top
R107 "53635-3857" R0603 89.447,88.147 r180 top
R108 "RXF56K000/FZQ" R0603 89.422,85.623 r180 top
R109 "RXF1K5000/FZQ" R0603 59.78,53.556 r270 top
R110 "RXF33K000/FZQ" R0603 65.128,53.706 r0 top
R111 "RXF68K000/FZQ" R0603 90.797,85.598 r180 top
R112 "53635-3857" R0603 90.347,57.63 r180 top
R113 "RXF56K000/FZQ" R0603 90.347,55.031 r180 top
R114 "52635-4236" R0603 91.671,55.031 r0 top
R115 "RXF100K00/FZQ" R0603 36.985,47.508 r90 top
R116 "RXF15K000/FZQ" R0603 35.5,45.675 r90 top
R117 "RXF330R00/FZQ" R0603 89.472,98.02 r90 top
R118 "53635-3857" R0603 36.985,41.034 r270 top
R119 "53635-3857" R0603 35.486,44.359 r270 top
R120 "RXF330R00/FZQ" R0603 89.472,101.869 r90 top
R121 "RXF220R00/FZQ" R0603 197.519,39.785 r270 top
R122 "RXF220R00/FZQ" R0603 197.519,41.209 r270 top
R123 "RXF330R00/FZQ" R0603 94.646,98.72 r270 top
R124 "RXF68K000/FZQ" R0603 93.121,100.119 r270 top
R125 "RXF3K3000/FZQ" R0603 159.05,97.05 r0 top
R126 "RXF3K3000/FZQ" R0603 157.8,97.075 r0 top
R127 "RXF3K3000/FZQ" R0603 155.4,86.4 r180 top
R128 "RXF0R3300/JETT" 2010_007-5 5.8,47.575 r270 top
R129 "RXF0R3300/JETT" 2010_007-5 29.6,51.15 r90 top
R130 "RXF3K3000/FZQ" R0603 156.55,97.15 r0 top
RL1 "70632-130" T_PB 44.95,66.425 r0 top
S1 "70624-172" DTSJW-66N 111.8,43.9 r270 top
S2 "AWT25-000132" DTSM-26K-V-T-R 201.2,10.4 r270 top
TOOL1 "none" TOOL 193,101 r90 top
TOOL2 "none" TOOL 33,4 r90 top
TOOL3 "none" TOOL 193,4 r90 top
U1 "AWT25-000108" Ziv_SOT2 179.826,57.644 r180 top
U2 "AWT25-000108" Ziv_SOT2 179.826,76.294 r180 top
U3 "AWT25-000108" Ziv_SOT2 179.826,94.944 r180 top
U4 "AWT25-000126" TSSOP16#1 172.729,48.271 r0 top
U5 "AWT25-000129" TSSOP14 157.05,91.7 r90 top
U6 "IXA/TLC274ACDR" SM14 18.5,79.9 r180 top
U7 "AWT25-000115" SOIC6 125.475,35.375 r270 top
U8 "TUSB2046BS" PQFP_32 152.222,50.372 r180 top
U9 "AWT25-000127" TSSOP16#2 25.901,42.725 r0 top
U10 "AWT25-000115" SOIC6 127.151,94.1 r0 top
U11 "IXA/LM393D" SOIC8_210 41.325,44.425 r0 top
U12 "AWT25-000127" TSSOP16#2 25.175,66.15 r0 top
U13 "IXD/V3020S08B" SOIC8 157.03,76.35 r90 top
U14 "AD5201S" uSOIC10 13.375,11.775 r180 top
U15 "IXA/LMV321M7" SC70-5 10.75,18.85 r0 top
U16 "AWT25-000129" TSSOP14 129.85,68.475 r90 top
U17 "TLV1504IPWS" SOIC16_400 13.725,68.575 r90 top
U18 "SC18IS600S" TSSOP16#2 144.983,71.901 r0 top
U19 "TMP_UK_TPS5430" SOIC8_PP 86.123,90.222 r90 top
U20 "TMP_UK_TPS5430" SOIC8_PP 86.948,59.58 r90 top
U21 "*" SO20_POWER 17.5,54.525 r270 top
U26 "AWT25-000129" TSSOP14 25.15,71.7 r0 top
VR1 "ZX12V00/0W35" SOT23#2 22.425,95.675 r180 top
VR2 "ZX2V700/0W35A" SOT23#1 68.375,44.475 r180 top
VR3 "ZX12V00/0W35" SOT23#1 61.029,64.503 r180 top
VR4 "27479-0237" TO-252 98.645,99.419 r270 top
Y1 "70648-150" SMY49 147.382,43.509 r0 top
Y2 "70648-169" SMY7 154.255,66.228 r270 top

## Footprints (in the part's own frame and the unit in brackets; to place one, negate y for a bottom-side part, rotate by r counter-clockwise, add the part's x,y. Pads: shape width x height; smd on the part's side, far side on the other; paste and mask are expansions set on the pad)
22-27-2021 [mm]
  round 1.5 hole 1.07: 1(0,0) 2(2.54,0)
  silkscreen extent -1.27,-3.1 3.81,3.25
2010_007-5 [mm] "2010 Series 0.007 - 0.5 Ohms"
  rect 3.05x1.4 smd: 1(0,2.35) 2(0,-2.35)
  silkscreen extent -1.3,-2.55 1.3,2.55
A_7-188275-6 [mm] "Amp 188275 series 2.54 mm pitch, 6 way, jack. Rev. 1"
  rect 1.5x3.5 smd: 1(0,0) 2(1.27,-5) 3(2.54,0) 4(3.81,-5) 5(5.08,0) 6(6.35,-5)
  silkscreen extent -1.83,-5 8.18,0
AJ-012SH-7-D-3 [mm]
  round 1.5 hole 0.9: 1(0,0) 2(-1.27,2.54) 3(-2.54,0) 4(-3.81,2.54) 5(-5.08,0) 6(-6.35,2.54)
  round 2.5 hole 1.6: 7(-11.02,11.94) 8(4.67,11.94)
  round 3.5 hole 3.2: 9(-8.89,8.89) 10(2.54,8.89)
  silkscreen extent -11.25,-1.26 4.9,15.44
C4.5X6.1 [mm] "Panasonic size B, EEEFK1 Series, Rev. 1"
  rect 1.2x2.5 smd: 1(0,1.584) 2(0,-1.584)
  silkscreen extent -2.3,-2.3 2.25,2.3
C6.3X5.8 [mm] "Rev.1"
  rect 1.85x3.5 smd paste+0: 1(0,2.794) 2(0,-2.794)
  silkscreen extent -3.3,-3.3 3.3,3.3
C6.3X8#1 [mm]
  rect 1.85x3.5 smd: 1(0,2.794) 2(0,-2.794)
  silkscreen extent -3.3,-3.3 3.3,3.3
C6.3X8#2 [mm]
  rect 1.85x3.5 smd paste+0: 1(0,2.794) 2(0,-2.794)
  silkscreen extent -3.3,-3.3 3.3,3.3
C8X10 [mm]
  rect 2.1x4.1 smd: 1(0,3.454) 2(0,-3.454)
  silkscreen extent -4.14,-4.14 4.14,4.14
C35X35 [mm] "Diameter 10mm pitch, 35mm, height 37mm, Rev. 1"
  rect 6x6 hole 2.1: 1(0,0)
  round 6 hole 2.1: 2(10,0)
  silkscreen extent -13,-18 23,18
C0603 [mm]
  rect 1.05x0.81 smd: 1(0,0.762) 2(0,-0.762)
  silkscreen extent -0.43,-0.79 0.43,0.79
C0805#1 [mm] "Rev.1"
  rect 1.5x1 smd: 1(0,0.95) 2(0,-0.95)
  silkscreen extent -0.6,-1 0.6,1
C0805#2 [mm] "Chip Capacitor; Body 2.0 x 1.2 mm (LxW typ)"
  rect 1.3x1.5 smd: 1(-0.95,0) 2(0.95,0)
  silkscreen extent -1.9,-0.65 -1.9,0.65
C1206 [mm]
  rect 1.9x1.15 smd: 1(0,1.448) 2(0,-1.448)
  silkscreen extent -0.89,-1.65 0.89,1.65
C3216 [mm]
  rect 1.5x1.65 smd: 1(0,1.524) 2(0,-1.524)
  silkscreen extent -0.89,-1.65 0.89,1.65
CU_PJ-006A [mm] "Cui, PJ-006A, Rev. 1"
  oct 2x5.5 hole 3.5: 1(0,0)
  oct 5x2 hole 3: 2(2.95,-5.5) 3(5.55,-2.8)
  silkscreen extent 0,-6.4 8.7,4.3
DPAK [mil]
  oval 70.87x98.43 smd: 1(-90,-170) 3(90,-170)
  rect 250x250 smd: 2(0,95)
  silkscreen extent -130,-195 130,195
DTSJW-66N [mm] "SMT 6MM PUSH BUTTON"
  rect 1.4x2.3 smd: 1(-2,-3.15) 2(-2,3.15) 3(2,-3.15) 4(2,3.15)
  silkscreen extent -3.15,-3.1 3.15,3.1
DTSM-26K-V-T-R [mm] "SMT 12MM PUSH BUTTON, Rev. 2"
  rect 1.55x1.6 smd: 1(-6.975,-2.5) 2(-6.975,2.5) 3(6.975,-2.5) 4(6.975,2.5)
  silkscreen extent -7.5,-6 7.5,6
FIDUCIAL [mil] "Height was 0 mm."
  round 80 / inner round 90 / far side round 80 all layers, no hole: 1(0,0)
  silkscreen extent -40,-40 40,40
FSMD050-2920 [mm]
  rect 2.3x5.6 smd: 1(-3.7,0) 2(3.7,0)
  silkscreen extent -3.99,-2.72 3.99,2.72
L0805S [mm]
  rect 1.2x1.15 smd: 1(0,0.965) 2(0,-0.965)
  silkscreen extent -0.64,-1.02 0.64,1.02
LED_KP3216 [mm] "Kingbright 3.2 x 1.6 mm lamp, Rev. 1"
  rect 1.75x1.5 smd: 1(-1.7,0) 2(1.7,0)
  silkscreen extent -1.6,-0.8 1.6,0.8
M_22-27-2041 [mm] "Molex 6410 type header, 4 way, 2.54mm pitch, Rev. 1"
  rect 1.7x1.7 hole 1.2: 1(0,0)
  round 1.7 hole 1.2: 2(2.54,0) 3(5.08,0) 4(7.62,0)
  silkscreen extent -1.27,-3.1 8.89,3.25
M_22-27-2051 [mm] "Molex 6410 type header, 5 way, 2.54mm pitch, Rev. 1"
  rect 1.7x1.7 hole 1.2: 1(0,0)
  round 1.7 hole 1.2: 2(2.54,0) 3(5.08,0) 4(7.62,0) 5(10.16,0)
  silkscreen extent -1.27,-3.1 11.43,3.25
M_53398-0490-PIN_REV [mm] "Molex 53398-04XX Rev.1"
  rect 0.8x1.3 smd: 1(3.75,0) 2(2.5,0) 3(1.25,0) 4(0,0)
  rect 2.1x3.1 smd: 5(-2.55,-2.8) 6(6.3,-2.8)
  silkscreen extent -3,-4 6.75,0.3
M_53398-1590-PIN_REV [mm] "Molex 53398-15XX Rev.1"
  rect 0.8x1.3 smd: 1(17.5,0) 2(16.25,0) 3(15,0) 4(13.75,0) 5(12.5,0) 6(11.25,0) 7(10,0) 8(8.75,0) 9(7.5,0) 10(6.25,0) 11(5,0) 12(3.75,0) 13(2.5,0) 14(1.25,0) 15(0,0)
  rect 2.1x3.1 smd: 16(-2.55,-2.8) 17(20.05,-2.8)
  silkscreen extent -3,-4 20.5,0.3
NPTH_3_5MM [mm] "Mounting Hole. Rev.1"
  round 0.5 hole 3.5 unplated: 1(0,0)
NS9360_BOOT [mil]
  round 70 hole 40: 1(0,0) 2(0,-100) 3(0,-200) 4(0,-300) 6(0,-500) 7(0,-600)
  silkscreen extent -59,-669 59,59
NS9360_MODULE_NIC [mm] "Rev.1"
  round 1 hole 1.2 unplated: 0(2.2,-49.7) 0(37.8,-49.7)
  round 0.6 hole 0.8 unplated: 1(2.2,2.5) 1(37.8,2.5)
  rect 2x0.53 smd: A1(40,0) A2(35.6,0) A3(40,-0.8) A4(35.6,-0.8) A5(40,-1.6) A6(35.6,-1.6) A7(40,-2.4) A8(35.6,-2.4) A9(40,-3.2) A10(35.6,-3.2) A11(40,-4) A12(35.6,-4) A13(40,-4.8) A14(35.6,-4.8) A15(40,-5.6) A16(35.6,-5.6) A17(40,-6.4) A18(35.6,-6.4) A19(40,-7.2) A20(35.6,-7.2) A21(40,-8) A22(35.6,-8) A23(40,-8.8) A24(35.6,-8.8) A25(40,-9.6) A26(35.6,-9.6) A27(40,-10.4) A28(35.6,-10.4) A29(40,-11.2) A30(35.6,-11.2) A31(40,-12) A32(35.6,-12) A33(40,-12.8) A34(35.6,-12.8) A35(40,-13.6) A36(35.6,-13.6) A37(40,-14.4) A38(35.6,-14.4) A39(40,-15.2) A40(35.6,-15.2) A41(40,-16) A42(35.6,-16) A43(40,-16.8) A44(35.6,-16.8) A45(40,-17.6) A46(35.6,-17.6) A47(40,-18.4) A48(35.6,-18.4) A49(40,-19.2) A50(35.6,-19.2) A51(40,-20) A52(35.6,-20) A53(40,-20.8) A54(35.6,-20.8) A55(40,-21.6) A56(35.6,-21.6) A57(40,-22.4) A58(35.6,-22.4) A59(40,-23.2) A60(35.6,-23.2) A61(40,-24) A62(35.6,-24) A63(40,-24.8) A64(35.6,-24.8) A65(40,-25.6) A66(35.6,-25.6) A67(40,-26.4) A68(35.6,-26.4) A69(40,-27.2) A70(35.6,-27.2) A71(40,-28) A72(35.6,-28) A73(40,-28.8) A74(35.6,-28.8) A75(40,-29.6) A76(35.6,-29.6) A77(40,-30.4) A78(35.6,-30.4) A79(40,-31.2) A80(35.6,-31.2) A81(40,-32) A82(35.6,-32) A83(40,-32.8) A84(35.6,-32.8) A85(40,-33.6) A86(35.6,-33.6) A87(40,-34.4) A88(35.6,-34.4) A89(40,-35.2) A90(35.6,-35.2) A91(40,-36) A92(35.6,-36) A93(40,-36.8) A94(35.6,-36.8) A95(40,-37.6) A96(35.6,-37.6) A97(40,-38.4) A98(35.6,-38.4) A99(40,-39.2) A100(35.6,-39.2) A101(40,-40) A102(35.6,-40) A103(40,-40.8) A104(35.6,-40.8) A105(40,-41.6) A106(35.6,-41.6) A107(40,-42.4) A108(35.6,-42.4) A109(40,-43.2) A110(35.6,-43.2) A111(40,-44) A112(35.6,-44) A113(40,-44.8) A114(35.6,-44.8) A115(40,-45.6) A116(35.6,-45.6) A117(40,-46.4) A118(35.6,-46.4) A119(40,-47.2) A120(35.6,-47.2) B1(4.4,0) B2(0,0) B3(4.4,-0.8) B4(0,-0.8) B5(4.4,-1.6) B6(0,-1.6) B7(4.4,-2.4) B8(0,-2.4) B9(4.4,-3.2) B10(0,-3.2) B11(4.4,-4) B12(0,-4) B13(4.4,-4.8) B14(0,-4.8) B15(4.4,-5.6) B16(0,-5.6) B17(4.4,-6.4) B18(0,-6.4) B19(4.4,-7.2) B20(0,-7.2) B21(4.4,-8) B22(0,-8) B23(4.4,-8.8) B24(0,-8.8) B25(4.4,-9.6) B26(0,-9.6) B27(4.4,-10.4) B28(0,-10.4) B29(4.4,-11.2) B30(0,-11.2) B31(4.4,-12) B32(0,-12) B33(4.4,-12.8) B34(0,-12.8) B35(4.4,-13.6) B36(0,-13.6) B37(4.4,-14.4) B38(0,-14.4) B39(4.4,-15.2) B40(0,-15.2) B41(4.4,-16) B42(0,-16) B43(4.4,-16.8) B44(0,-16.8) B45(4.4,-17.6) B46(0,-17.6) B47(4.4,-18.4) B48(0,-18.4) B49(4.4,-19.2) B50(0,-19.2) B51(4.4,-20) B52(0,-20) B53(4.4,-20.8) B54(0,-20.8) B55(4.4,-21.6) B56(0,-21.6) B57(4.4,-22.4) B58(0,-22.4) B59(4.4,-23.2) B60(0,-23.2) B61(4.4,-24) B62(0,-24) B63(4.4,-24.8) B64(0,-24.8) B65(4.4,-25.6) B66(0,-25.6) B67(4.4,-26.4) B68(0,-26.4) B69(4.4,-27.2) B70(0,-27.2) B71(4.4,-28) B72(0,-28) B73(4.4,-28.8) B74(0,-28.8) B75(4.4,-29.6) B76(0,-29.6) B77(4.4,-30.4) B78(0,-30.4) B79(4.4,-31.2) B80(0,-31.2) B81(4.4,-32) B82(0,-32) B83(4.4,-32.8) B84(0,-32.8) B85(4.4,-33.6) B86(0,-33.6) B87(4.4,-34.4) B88(0,-34.4) B89(4.4,-35.2) B90(0,-35.2) B91(4.4,-36) B92(0,-36) B93(4.4,-36.8) B94(0,-36.8) B95(4.4,-37.6) B96(0,-37.6) B97(4.4,-38.4) B98(0,-38.4) B99(4.4,-39.2) B100(0,-39.2) B101(4.4,-40) B102(0,-40) B103(4.4,-40.8) B104(0,-40.8) B105(4.4,-41.6) B106(0,-41.6) B107(4.4,-42.4) B108(0,-42.4) B109(4.4,-43.2) B110(0,-43.2) B111(4.4,-44) B112(0,-44) B113(4.4,-44.8) B114(0,-44.8) B115(4.4,-45.6) B116(0,-45.6) B117(4.4,-46.4) B118(0,-46.4) B119(4.4,-47.2) B120(0,-47.2)
  silkscreen extent -2,-53.6 42,6.4
P2#1 [mm]
  rect 1.9x1.9 hole 1: 1(0,0)
  round 1.9 hole 1: 2(2.54,0)
  silkscreen extent -1.27,-1.27 3.81,1.27
P2#2 [mm]
  rect 1.9x1.9 / inner round 1 / far side rect 1.9x1.9 hole 1: 1(0,0)
  round 1.9 / inner round 1 / far side round 1.9 hole 1: 2(2.54,0)
  silkscreen extent -1.27,-1.27 3.81,1.27
PH2M54DR-16 [mm]
  round 1.5 hole 1: 1(0,0) 2(0,2.54) 3(2.54,0) 4(2.54,2.54) 5(5.08,0) 6(5.08,2.54) 7(7.62,0) 8(7.62,2.54) 9(10.16,0) 10(10.16,2.54) 11(12.7,0) 12(12.7,2.54) 13(15.24,0) 14(15.24,2.54) 15(17.78,0) 16(17.78,2.54)
  silkscreen extent -4.93,-3.03 22.71,5.57
PH2M54DR-20 [mm]
  round 1.5 hole 1: 1(0,0) 2(0,2.54) 3(2.54,0) 4(2.54,2.54) 5(5.08,0) 6(5.08,2.54) 7(7.62,0) 8(7.62,2.54) 9(10.16,0) 10(10.16,2.54) 11(12.7,0) 12(12.7,2.54) 13(15.24,0) 14(15.24,2.54) 15(17.78,0) 16(17.78,2.54) 17(20.32,0) 18(20.32,2.54) 19(22.86,0) 20(22.86,2.54)
  silkscreen extent -4.93,-3.03 27.79,5.57
PQFP_32 [mm]
  rect 1.2x0.5 smd: 1(0,0) 2(0,-1.2) 3(0,-2.4) 4(0,-3.6) 5(0,-4.8) 6(0,-6) 7(0,-7.2) 8(0,-8.4) 17(12.4,-8.4) 18(12.4,-7.2) 19(12.4,-6) 20(12.4,-4.8) 21(12.4,-3.6) 22(12.4,-2.4) 23(12.4,-1.2) 24(12.4,0)
  rect 0.5x1.2 smd: 9(2,-10.4) 10(3.2,-10.4) 11(4.4,-10.4) 12(5.6,-10.4) 13(6.8,-10.4) 14(8,-10.4) 15(9.2,-10.4) 16(10.4,-10.4) 25(10.4,2) 26(9.2,2) 27(8,2) 28(6.8,2) 29(5.6,2) 30(4.4,2) 31(3.2,2) 32(2,2)
  silkscreen extent 1.13,-9.27 11.27,0.87
PTAB1_4_8V [mm] "Rev. 1"
  round 2.6 hole 1.6: 1(-2.54,0) 2(2.54,0)
  silkscreen extent -4.45,-2 4.45,2
R0603 [mm]
  rect 1.05x0.8 smd: 1(0,0.762) 2(0,-0.762)
  silkscreen extent -0.43,-0.79 0.43,0.79
R1206 [mm]
  rect 1.9x1 smd: 1(0,1.524) 2(0,-1.524)
  silkscreen extent -0.89,-1.65 0.89,1.65
SC70-5 [mm]
  oval 0.5x0.4 smd: 1(-0.95,0.65) 2(-0.95,0) 3(-0.95,-0.65) 4(0.95,-0.65) 5(0.95,0.65)
  silkscreen extent -1.02,-1.02 1.02,1.02
SM14 [mm]
  oval 2x0.75 smd: 1(-2.921,3.81) 2(-2.921,2.54) 3(-2.921,1.27) 4(-2.921,0) 5(-2.921,-1.27) 6(-2.921,-2.54) 7(-2.921,-3.81) 8(2.921,-3.81) 9(2.921,-2.54) 10(2.921,-1.27) 11(2.921,0) 12(2.921,1.27) 13(2.921,2.54) 14(2.921,3.81)
  silkscreen extent -3.18,-4.44 3.18,4.44
SMA [mm] "Do-214 With Band"
  rect 1.7x2.1 smd: 1(0,2.057) 2(0,-2.057)
  silkscreen extent -1.27,-2.67 1.27,2.67
SMB_W-B [mm] "DO-214AA With Band, Rev. 1"
  rect 2.75x2.15 smd: 1(0,2.21) 2(0,-2.21)
  silkscreen extent -2.03,-2.79 2.03,2.79
SMY7 [mm] "IQD A103D, 90SMX, 91SMX. Rev. 1"
  rect 4.1x1.6 smd: 1(-4,-1.2) 2(4,-1.2) 3(4,1.2) 4(-4,1.2)
  silkscreen extent -5.15,-2 5.25,2
SMY49 [mm]
  rect 5.5x1.8 smd: 1(-4.699,0) 2(4.699,0)
  silkscreen extent -6.73,-2.41 6.73,2.41
SO20_POWER [mm] "ST Micro Jedec MO-166 Rev. 1"
  rect 1.6x0.75 smd: 1(-6.7,5.715) 2(-6.7,4.445) 3(-6.7,3.175) 4(-6.7,1.905) 5(-6.7,0.635) 6(-6.7,-0.635) 7(-6.7,-1.905) 8(-6.7,-3.175) 9(-6.7,-4.445) 10(-6.7,-5.715) 11(6.7,-5.715) 12(6.7,-4.445) 13(6.7,-3.175) 14(6.7,-1.905) 15(6.7,-0.635) 16(6.7,0.635) 17(6.7,1.905) 18(6.7,3.175) 19(6.7,4.445) 20(6.7,5.715)
  rect 3x3 smd: 21(-0.025,6.5) 23(-0.05,-6.5)
  rect 6.2x9.8 smd: 22(-0.05,-0.01)
  silkscreen extent -6.7,-8 6.7,8
SOD87 [mm]
  rect 1.5x2.5 smd: 1(-1.6,0) 2(1.6,0)
  silkscreen extent -1.85,-1.05 1.85,1.05
SOIC6 [mm]
  oval 1x0.5 smd paste+0: 1(-1.125,0.95) 2(-1.125,0) 3(-1.125,-0.95) 4(1.125,-0.95) 5(1.125,0) 6(1.125,0.95)
  silkscreen extent -1.4,-1.5 1.4,1.5
SOIC8 [mm]
  oval 1.5x0.65 smd: 1(-2.667,1.905) 2(-2.667,0.635) 3(-2.667,-0.635) 4(-2.667,-1.905) 5(2.667,-1.905) 6(2.667,-0.635) 7(2.667,0.635) 8(2.667,1.905)
  silkscreen extent -2.67,-2.54 2.67,2.54
SOIC8_210 [mm]
  oval 1.5x0.65 smd paste+0: 1(-3.556,1.905) 2(-3.556,0.635) 3(-3.556,-0.635) 4(-3.556,-1.905) 5(3.556,-1.905) 6(3.556,-0.635) 7(3.556,0.635) 8(3.556,1.905)
  silkscreen extent -3.81,-3.3 3.81,3.3
SOIC8_PP [mm]
  rect 2x0.66 smd: 1(-2.8,1.935) 2(-2.8,0.665) 3(-2.8,-0.605) 4(-2.8,-1.875) 5(2.8,-1.875) 6(2.8,-0.605) 7(2.8,0.665) 8(2.8,1.935)
  rect 2.5x3 smd: 9(0,0)
  silkscreen extent -2.8,-2.49 2.8,2.49
SOIC16_400 [mm] "Texas 16 pin, 1.27mm pitch, SOIC, 4.00 wide, Rev. 1"
  oval 1.8x0.75 smd: 1(-3.048,4.445) 2(-3.048,3.175) 3(-3.048,1.905) 4(-3.048,0.635) 5(-3.048,-0.635) 6(-3.048,-1.905) 7(-3.048,-3.175) 8(-3.048,-4.445) 9(3.048,-4.445) 10(3.048,-3.175) 11(3.048,-1.905) 12(3.048,-0.635) 13(3.048,0.635) 14(3.048,1.905) 15(3.048,3.175) 16(3.048,4.445)
  silkscreen extent -3.18,-5.08 3.18,5.08
SOT23#1 [mm]
  rect 1x1 smd: 1(-0.965,-1.143) 2(0.965,-1.143)
  rect 1x1.25 smd: 3(0,1.016)
  silkscreen extent -1.52,-1.52 1.52,1.52
SOT23#2 [mm] "SOT-23; 3 Leads; Body 3.1 x 2.5 mm, inc. leads (LxW max), Alternate Lead Configuration"
  rect 0.9x0.95 smd: 1(0,1.175) 2(0.95,-1.175) 3(-0.95,-1.175)
  silkscreen extent -1.3,-0.3 1.3,2.32
SOT143B [mm] "SOT-143; 4 Leads; Body 3 x 2.5 mm, inc. leads (LxW max)"
  rect 1.35x1.25 smd: 1(-0.75,-1.075)
  rect 0.9x1.25 smd: 2(0.95,-1.075) 3(0.95,1.075) 4(-0.95,1.075)
  silkscreen extent -1.5,-1.1 1.5,1.2
SOT-223 [mm]
  oval 1x2.2 smd: 1(-2.3,-2.95) 2(0,-2.95) 3(2.3,-2.95)
  rect 3.3x2.2 smd: 4(0,2.95)
  silkscreen extent -3.25,-3.5 3.25,3.5
T_PB [mm] "Tyco PB Type Relay Rev. 1"
  round 3 hole 1.7: 11(6.25,-8.75) 12(5,-3.75) 14(6.25,1.25) A2(0,0)
  rect 3x3 hole 1.7: A1(0,-7.5)
  silkscreen extent -5,-11.25 10,3.75
TO-252 [mm]
  oval 1.2x1.7 smd: 1(-2.28,-4.6) 3(2.28,-4.6)
  rect 5.5x6.2 smd: 2(0,2.35)
  silkscreen extent -3.3,-4.95 3.3,4.95
TOOL [mm] "Rev.2 was 'plated'"
  round 3.2 hole 3.2 unplated: 1(0,0)
  silkscreen extent -1.6,-1.6 1.6,1.6
TSSOP14 [mm]
  oval 1.8x0.4 smd: 1(-2.99,1.95) 2(-2.99,1.3) 3(-2.99,0.65) 4(-2.99,0) 5(-2.99,-0.65) 6(-2.99,-1.3) 7(-2.99,-1.95) 8(3,-1.95) 9(3,-1.3) 10(3,-0.65) 11(3,0) 12(3,0.65) 13(3,1.3) 14(3,1.95)
  silkscreen extent -3.2,-2.65 3.2,2.65
TSSOP16#1 [mm]
  rect 1x0.4 smd: 1(0,0) 2(0,-0.65) 3(0,-1.3) 4(0,-1.95) 5(0,-2.6) 6(0,-3.25) 7(0,-3.9) 8(0,-4.55) 9(5.8,-4.55) 10(5.8,-3.9) 11(5.8,-3.25) 12(5.8,-2.6) 13(5.8,-1.95) 14(5.8,-1.3) 15(5.8,-0.65) 16(5.8,0)
  silkscreen extent 0,-4.82 5.85,0.28
TSSOP16#2 [mm]
  oval 1.8x0.4 smd: 1(-2.99,2.27) 2(-2.99,1.62) 3(-2.99,0.97) 4(-2.99,0.32) 5(-2.99,-0.33) 6(-2.99,-0.98) 7(-2.99,-1.63) 8(-2.99,-2.28) 9(3,-2.28) 10(3,-1.63) 11(3,-0.98) 12(3,-0.33) 13(3,0.32) 14(3,0.97) 15(3,1.62) 16(3,2.27)
  silkscreen extent -3.2,-2.65 3.2,2.65
USB-A-4-V [mm] "USB  A Vertical"
  round 1.27 / inner round 0.95 / far side round 1.27 hole 0.95: 1(0,0) 2(2.5,0) 3(4.5,0) 4(7,0)
  round 3 / inner round 2.3 / far side round 3 hole 2.3: 5(-3.07,-2.4) 6(10.07,-2.4)
  silkscreen extent -3.7,-3.8 10.7,2
uSOIC10 [mm]
  rect 1.2x0.35 smd: 1(0,0) 2(0,-0.5) 3(0,-1) 4(0,-1.5) 5(0,-2) 6(4.4,-2) 7(4.4,-1.5) 8(4.4,-1) 9(4.4,-0.5) 10(4.4,0)
  silkscreen extent 0,-2.58 4.4,0.58
WE-PD-XL [mm]
  rect 2.9x5.4 smd: 1(4.95,0) 2(-4.95,0)
  silkscreen extent -6,-6 6,6
XRLV1101884901 [mm]
  round 1.5 hole 0.9: 1(4.445,2.54) 2(3.175,0) 3(1.905,2.54) 4(0.635,0) 5(-0.635,2.54) 6(-1.905,0) 7(-3.175,2.54) 8(-4.445,0)
  round 1.7 hole 1: 9(3.795,13) 10(6.335,13) 11(-6.335,13) 12(-3.795,13)
  round 2.5 hole 1.6: 13(-7.875,5) 14(7.875,5)
  round 3.5 hole 3.2 unplated: 15(5.715,8.89) 16(-5.715,8.89)
  silkscreen extent -8,-1.26 8,15.44
Y_2B80P4 [mm] "Yuasa Button Cell 2B80P4, Rev.1"
  round 2.6 hole 1.4: 1(0,0) 2(0,10) 3(12.6,5)
  Keep-Out Layer region: -0.5,8.25 0.5,8.25 0.5,1.75 -0.5,1.75 -0.5,8.25
  silkscreen extent -0.2,-2.6 12.9,12.6
Ziv_SOT2 [mm] "ISSI TSOP 44 pin 0.8mm pitch, Rev. 1"
  rect 0.45x1.5 smd: 1(-10.4,-5.55) 2(-9.6,-5.55) 3(-8.8,-5.55) 4(-8,-5.55) 5(-7.2,-5.55) 6(-6.4,-5.55) 7(-5.6,-5.55) 8(-4.8,-5.55) 9(-4,-5.55) 10(-3.2,-5.55) 11(-2.4,-5.55) 12(-1.6,-5.55) 13(-0.8,-5.55) 14(0,-5.55) 15(0.799,-5.55) 16(1.599,-5.55) 17(2.399,-5.55) 18(3.136,-5.55) 19(3.936,-5.55) 20(4.8,-5.55) 21(5.6,-5.55) 22(6.4,-5.55) 23(6.4,5.55) 24(5.6,5.55) 25(4.8,5.55) 26(3.936,5.55) 27(3.136,5.55) 28(2.399,5.55) 29(1.599,5.55) 30(0.799,5.55) 31(-0.001,5.55) 32(-0.8,5.55) 33(-1.6,5.55) 34(-2.4,5.55) 35(-3.2,5.55) 36(-4,5.55) 37(-4.8,5.55) 38(-5.6,5.55) 39(-6.4,5.55) 40(-7.2,5.55) 41(-8,5.55) 42(-8.8,5.55) 43(-9.6,5.55) 44(-10.4,5.55)
  silkscreen extent -11.31,-5.67 6.99,4.4

## Part data
BT1: library part Y_2B80P4, "Battery, Button Cell 3V, MimH"
C1 C2 C3 C4 C5 C7 C8 C16 C25 C28 C32 C33 C35 C36 C39 C40 C41 C42 C44 C46 C47 C48 C49 C56 C62 C64 C65 C69: library part X7R_100n_25V_10S, "Capacitor, 100nF 25V"
C6: library part C35X35_22000u_25VS, "Capacitor, 22000uF 25V 20%"
C9: library part C8X10_22u_20_50V, "Capacitor, 22uF 20% 50V"
C10: library part X7R_100n_63V_10, "Capacitor, 100nF 10% 63V"
C11: library part X7R_1n_50V_10S, "Capacitor, 1nF 50V"
C17 C22 C50 C57 C63: library part C6.3X8__100u_25V, "Capacitor, 100uF 25V"
C18 C19 C20 C21: library part COG_22p_50V_10S, "Capacitor, 22pF 50V"
C23 C24: library part COG_33p_50V_10S, "Capacitor, 33pF 50V"
C27 C29 C30: library part X7R_10n_100V_10S, "Capacitor, 10nF 100V"
C31: library part X7R_1u0_25V_10, "Capacitor, 1.0uF 25V"
C34: library part C4.5X6.1_10u_25VS, "Capacitor, 10uF 25V 20%"
C37 C38: library part COG_15p_50V_10S, "Capacitor, 15pF 50V"
C51 C58: library part X7R_2u2_50V_10, "Capacitor, 2.2uF 10% 50V"
C52 C53 C54 C59 C60 C61: library part C8X10_330u_25V, "Capacitor, 330uF 25V"
C55: library part C3216_10u_10V_20, "Capacitor, 10uF 10V"
C66: library part C6.3X5.8_100u_16VS, "Capacitor, 100uF 16V 20%"
D1: library part BAT74S, "Diode, BAT74"
D2: library part LED_KP-3216ID, "Diode, KP-3216ID, Red LED SMT"
D3 D6: library part MBRS140T3, "Diode, MBRS140T3"
D4 D7: library part BYD17DS, "Rectifier Diode, BYD17D"
D5: library part 12CWQ10FNTR, "Diode, 12 Amp Schottky Rectifier 100V 12CWQ10FNTR"
D8 D10: library part 10MQ040, "Diode Schottky Rectifier, 10MQ040"
FID1 FID2 FID3: library part FIDUCIAL, "FIDUCIAL"
H1 H2: library part NPTH_3.5MM, "Non-plated mounting hole for M3 thread"
J1: library part PJ-006A, "Connector, DC Power Jack, PJ-0006A"
J3: library part CCUSBA-32001-30X, "Connector, USB A Type Vertical Single"
J4 J6: library part A_7-188275-6, "Connector, 6 Way Receptacle"
J5: library part XRLV1101884901S, "Connector, XRLV1101884901, Modular Jack with LAN Magnetics"
J7: library part AJ-012SH-7-D-3, "CONNECTOR 6 WAY RJ12 VERTICAL"
L7 L8 L9 L10 L11 L12 L13 L14 L15 L16 L17 L18 L19 L20 L21 L22 L23 L24 L25 L26 L27 L28 L29 L30 L31 L32 L33 L34 L35 L36 L37 L39: library part BLP21PS, "Inductor, Chip Ferrite, BLM21PG300SN1B"
L38 L40: "Power Inductor"
MOD1: library part NS9360_MODULE, "MOD, Net Silicon NS9360 Module"
P1: "N9360 serial boot header - No BOM entry"
P2 P3 P4 P12: library part P2, "Connector, 2 Pin Male"
P5: library part NS9360_ICE_HEADER, "NS9360 ICE Header"
P6: library part M_53398-1590S, "CONNECTOR 15 WAY 1.25mm HEADER"
P7: library part M_22-27-2041, "Connector, 4 WAY LOCKING WAFER (2.54), MOLEX 2-27-2041"
P8: library part M_53398-0490S, "CONNECTOR 4 WAY 1.25mm HEADER"
P9: library part M_22-27-2051, "Connector, 5 WAY LOCKING WAFER (2.54), Molex 22-27-2051"
P10: library part M_53398-1090S, "CONNECTOR 10 WAY 1.25mm HEADER"
P11: library part 3M_3599-6002, "Connector, 3599-6002 16WAY LOW PROFILE BOXED HEADER"
P13: library part M_22-27-2021, "Connector, Molex 22-27-2021 2 WAY LOCKING WAFER (2.54)"
P14: library part V_S505-XX, "Connector, 1 Pin Tab Vertical Mount, 5.08mm pitch"
Q1: library part BC857, "Transistor, BC857"
Q2 Q4 Q6 Q7 Q8: library part BC847A, "Transistor, BC847A, general purpose"
Q3 Q9: library part FZT651, "Transistor, FZT651"
Q5: library part NTD2955T4, "Transistor, MTD2955T4"
R1 R2 R4 R6 R8 R9 R11 R13 R15 R17 R19 R21 R23 R25 R27 R29: library part 10R_0W10S, "Resistor, 10R"
R3 R5 R7 R10 R12 R14 R16 R18 R20 R22 R24 R26 R28 R30 R31 R32 R33 R34 R35 R37 R40 R41 R88: library part 22R_0W10S, "Resistor, 22R"
R36 R50 R54 R65 R76 R77 R78 R79 R84 R92 R93 R94 R97 R98 R99 R100 R102 R104 R125 R126 R127 R130: library part 3K3_0W10S, "Resistor, 3.3K"
R38 R39 R42 R43 R72 R83 R116: library part 15K_0W10S, "Resistor, 15K"
R44 R61 R109: library part 1K5_0W10S, "Resistor, 1.5K"
R45 R46 R91 R95 R96: library part 100R_0W10S, "Resistor, 100R"
R47 R51: library part 220K_0W10S, "Resistor, 220K"
R48 R71 R121 R122: library part 220R_0W10S, "Resistor, 220 Ohms"
R49 R105 R106: library part FSMD050-2920, "Fuse Resettable 0.5A"
R52: library part 1K_0W10S, "Resistor, 1K"
R53 R55 R60 R62 R63 R64 R66 R69 R80 R101 R123: library part 10K_0W10S, "Resistor, 10K"
R56: library part 27K_0W10S, "Resistor, 27K"
R57 R87 R89: library part 2K2_0W10S, "Resistor, 2.2K"
R58: library part 100R_0W25S, "Resistor, 100 Ohms"
R59 R82 R85 R86: library part 4K7_0W10S, "Resistor, 4.7K"
R67 R68 R74 R90: library part 47K_0W10S, "Resistor, 47K"
R70 R103 R115: library part 100K_0W10S, "Resistor, 100K"
R73 R75: library part 0R_0W10, "Resistor, 0 Ohm"
R81: library part 1R_0W25S, "Resistor, 1 Ohms"
R107 R112 R118 R119: library part 10K_0W10, "Resistor, 10K"
R108 R113: library part 56K_0W10S, "Resistor, 56K"
R110: library part 33K_0W10S, "Resistor, 33K"
R111 R124: library part 68K_0W10S, "Resistor, 68K"
R114: library part 24K9_0W10, "Resistor, 24.9K"
R117 R120: library part 330R_0W10S, "Resistor, 330 Ohms"
R128 R129: library part 2010_R033_5, "Resistor, 0.33 Ohm, 5%, 0W25"
RL1: library part T_PB114012, "Relay Miniature Power PCB Relay PB"
S1: library part DTSJW-66N-T-R, "Switch, DTSJW-66N-T/R, SMD Single Pole Pushbutton 6mm"
S2: library part DTSM-26K-V-T-R, "Switch DTSM-26K-V-T/R Single Pole Pushbutton 12mm"
TOOL1 TOOL2 TOOL3: library part TOOL, "TOOL"
U1 U2 U3: library part IS62WV51216ALLTLI-55, "IC, IS62WV51216ALL-55TLI, CMOS STATIC RAM"
U4: library part 74LVC139A_TSSOP, "IC, SN74LVC139A, Dual 2 to 4 line decoder"
U5 U16 U26: library part 74LCX06S, "IC, 74LCX06MTCX_NL, Hex Inverter with Open Drain Outputs"
U6: library part TLC274ACDRS, "IC, TLC274ACDR"
U7 U10: library part SN65220SDBVT, "IC, SN65220, Single transient voltage suppressor"
U8: "IC, TUSB2046B,  Port USB Hub"
U9 U12: library part 74LV123A_TSSOP, "IC, 74LVC123APW, Dual Retriggerable Monostable Multivibrator"
U11: library part LM393S, "IC, LM393D, Dual voltage comparator"
U13: library part V3020S08BS, "IC, V3020S08B, Real Time Clock"
U14: "IC, AD5201BRM10, 33 Position  Digital Potentiometer"
U15: library part LMV321S, "IC, LMV321M7X"
U17: "IC, TLV1504IPW,  Channel, 10 Bit ADC"
U18: "IC, SC18IS600, SPI to I2C Bridge Interface"
U19 U20: library part TPS5430S, "Regulator, TPS5430, 3A Step Down Converter"
U21: library part L9935, "IC, Two Phase Stepper Motor Driver"
VR1 VR3: library part BZX84-C12S, "Diode, BZX84-C12"
VR2: library part BZX84-C2V7S, "Diode, BZX84-C2V7"
VR4: library part LM1117DTX-ADJ, "Regulator, LM1117DTX-ADJ, Linear Regulator Adjustable"
Y1: library part XTAL003132S, "Crystal, 6 MHz"
Y2: library part XTAL_32.768KHz_SMY7, "Crystal, 32.768KHz"

## Via types
v1: diameter 0.6, hole 0.2, Top Layer to Bottom Layer, tented both sides, 894 vias
v2: diameter 0.6, hole 0.3, Top Layer to Bottom Layer, tented both sides, 199 vias
v3: diameter 0.6, hole 0.2, Top Layer to Bottom Layer, 18 vias
v4: diameter 0.4, hole 0.3, Top Layer to Bottom Layer, tented both sides, 2 vias